# Altium PCB HVPS.PcbDoc (part 1 of 2)
Units mm, origin at the board's own origin, x right, y up, seen from the top; angles counter-clockwise.
Board outline 99 x 77 mm, 4 copper layers (L1, L2, L3, L4), stack 0.603 mm thick; 95 components, 67 nets, 310 pads, 327 vias.
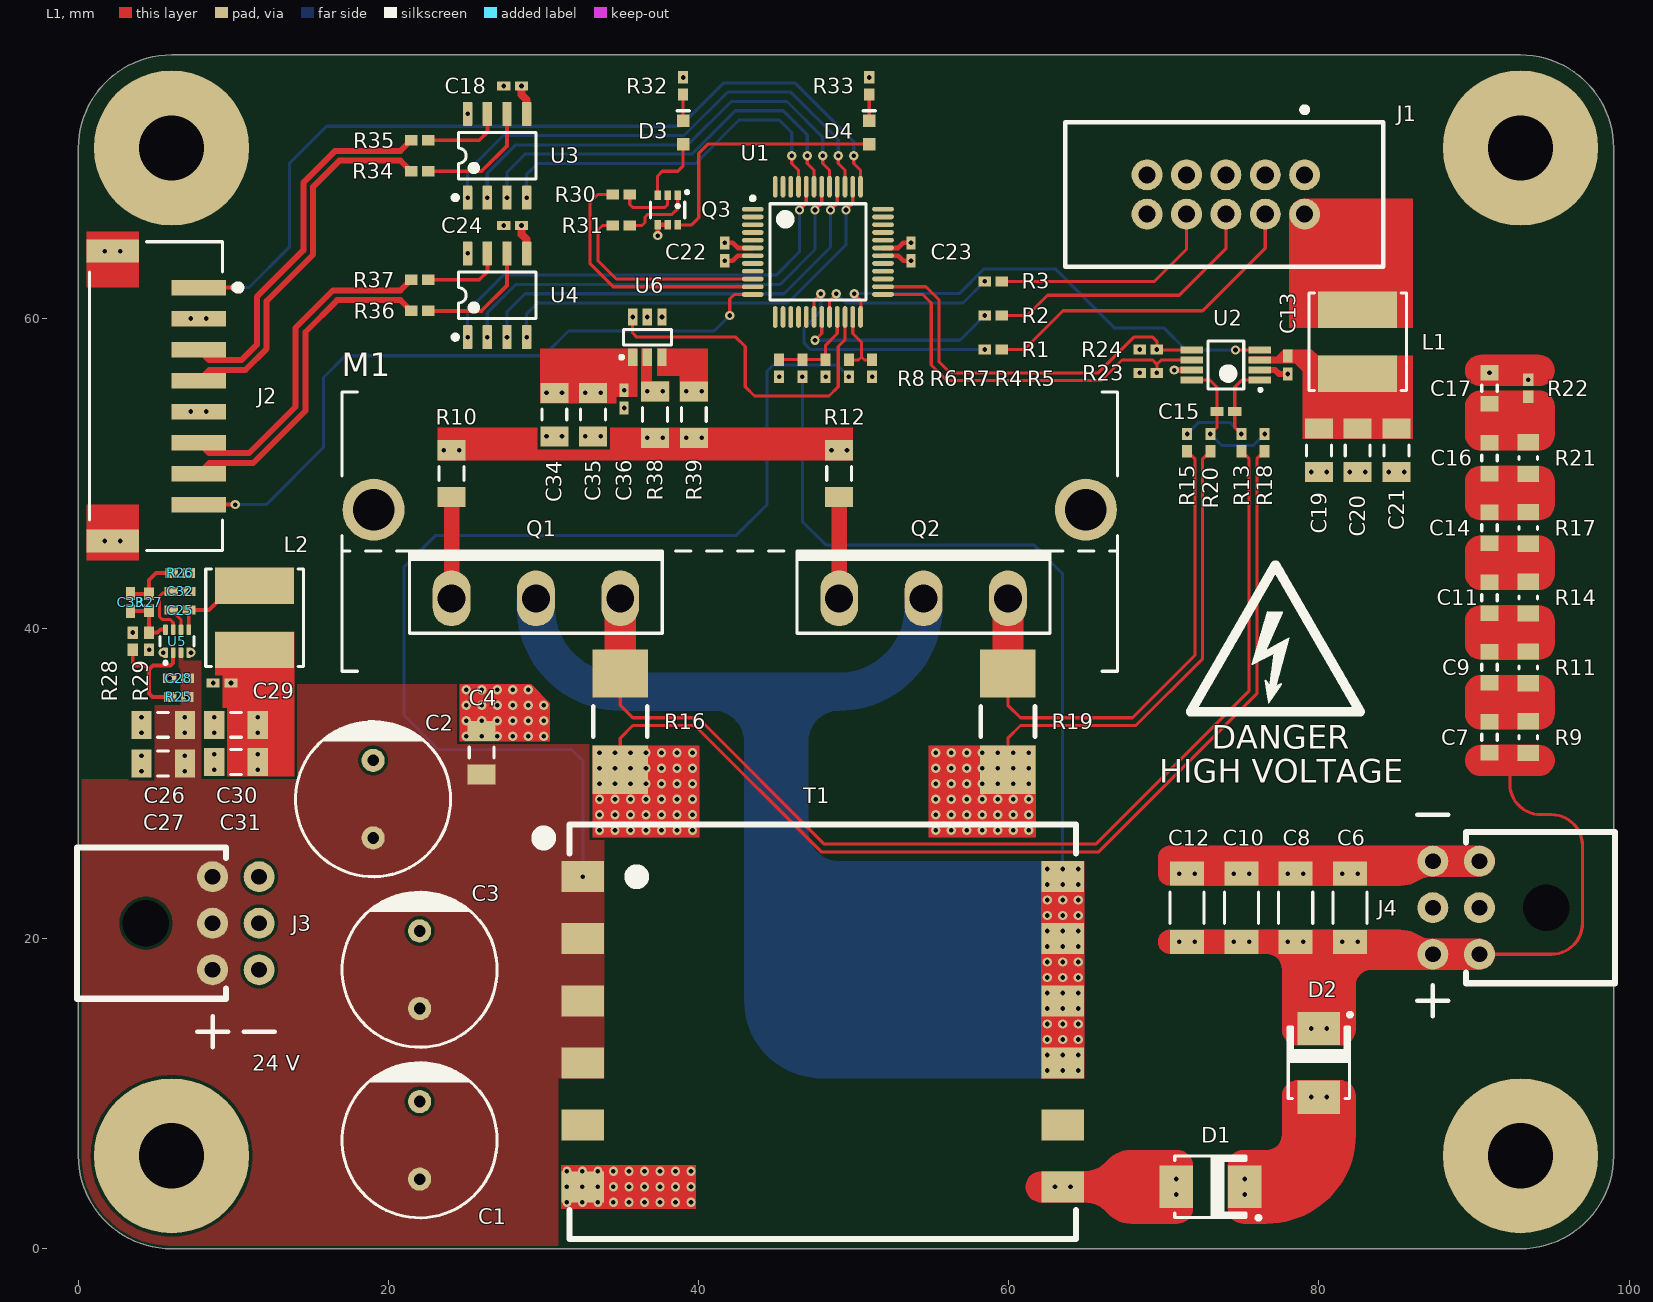
[diagram p0: L1 view]
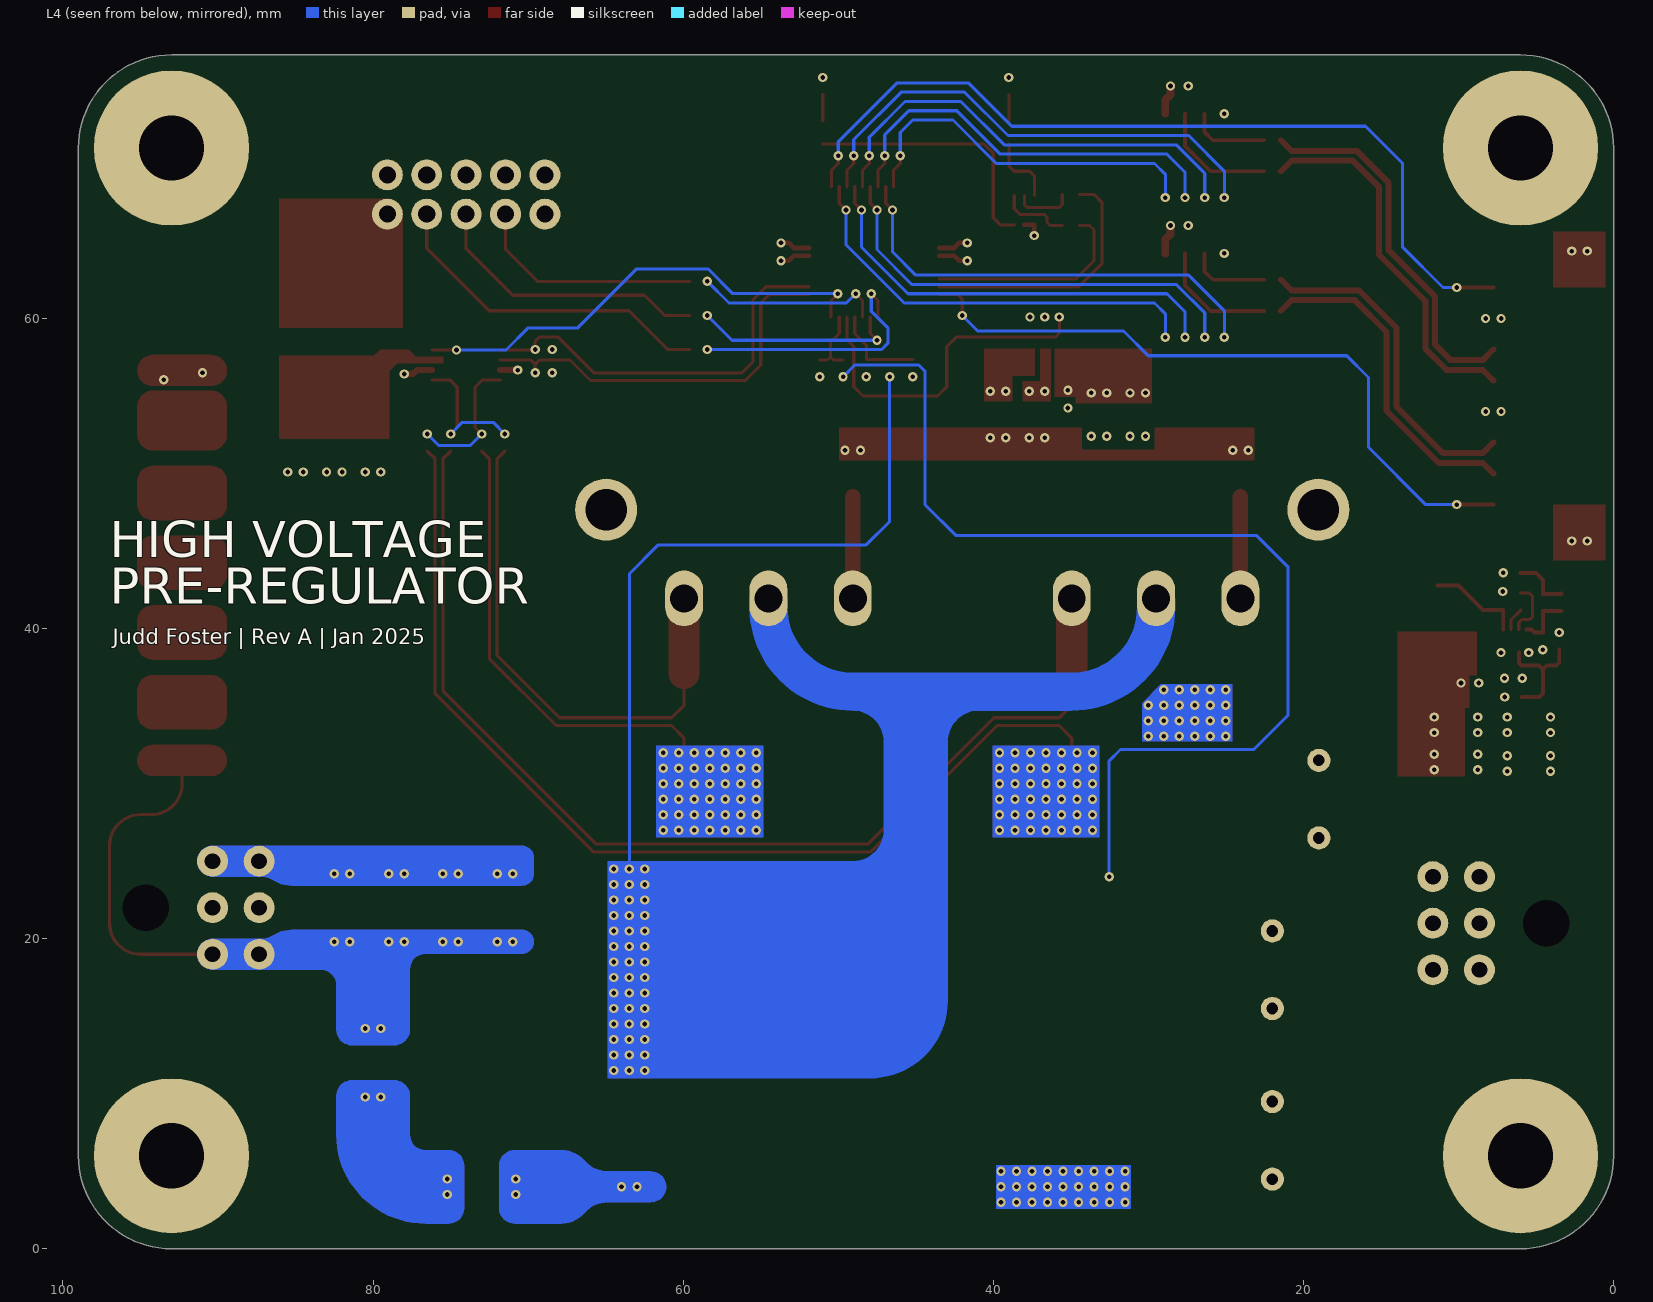
[diagram p1: L4 view, seen from below]
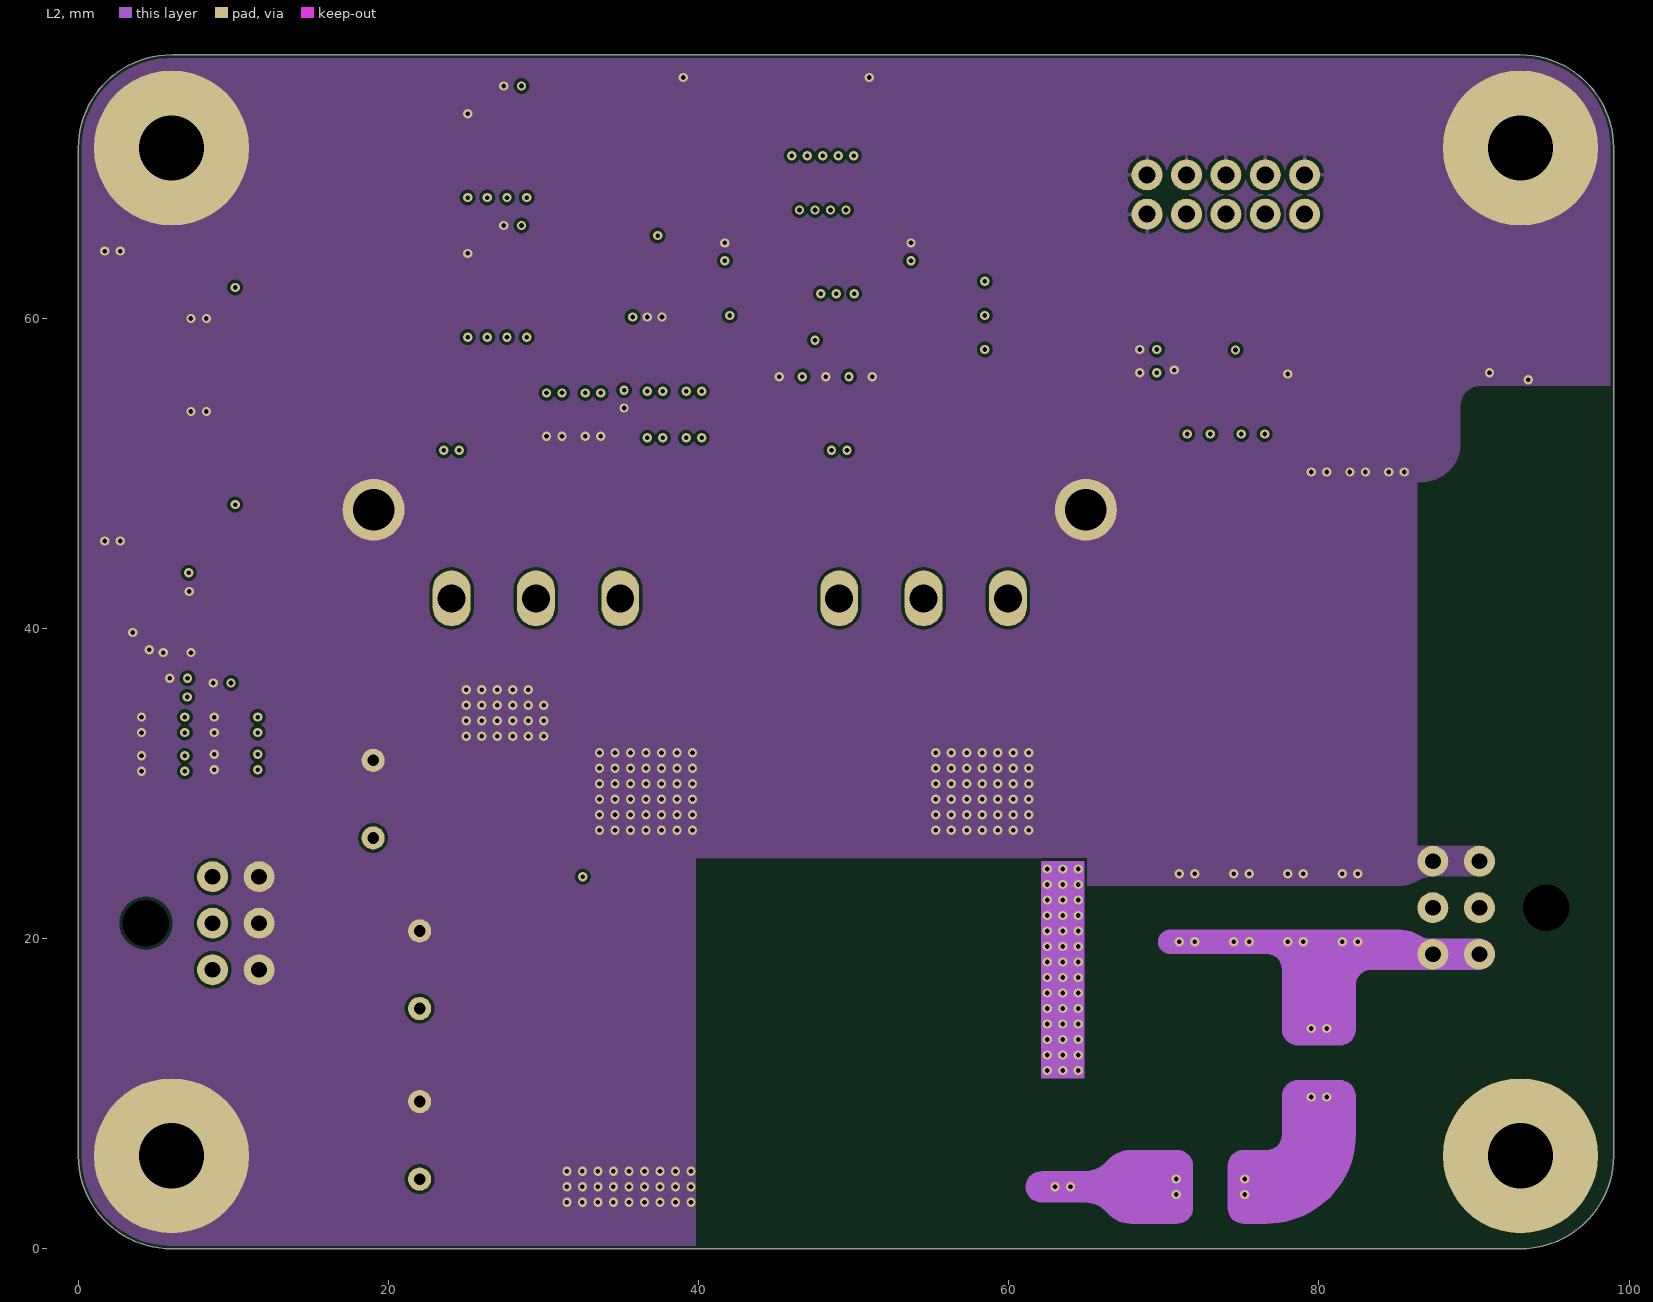
[diagram p2: L2]
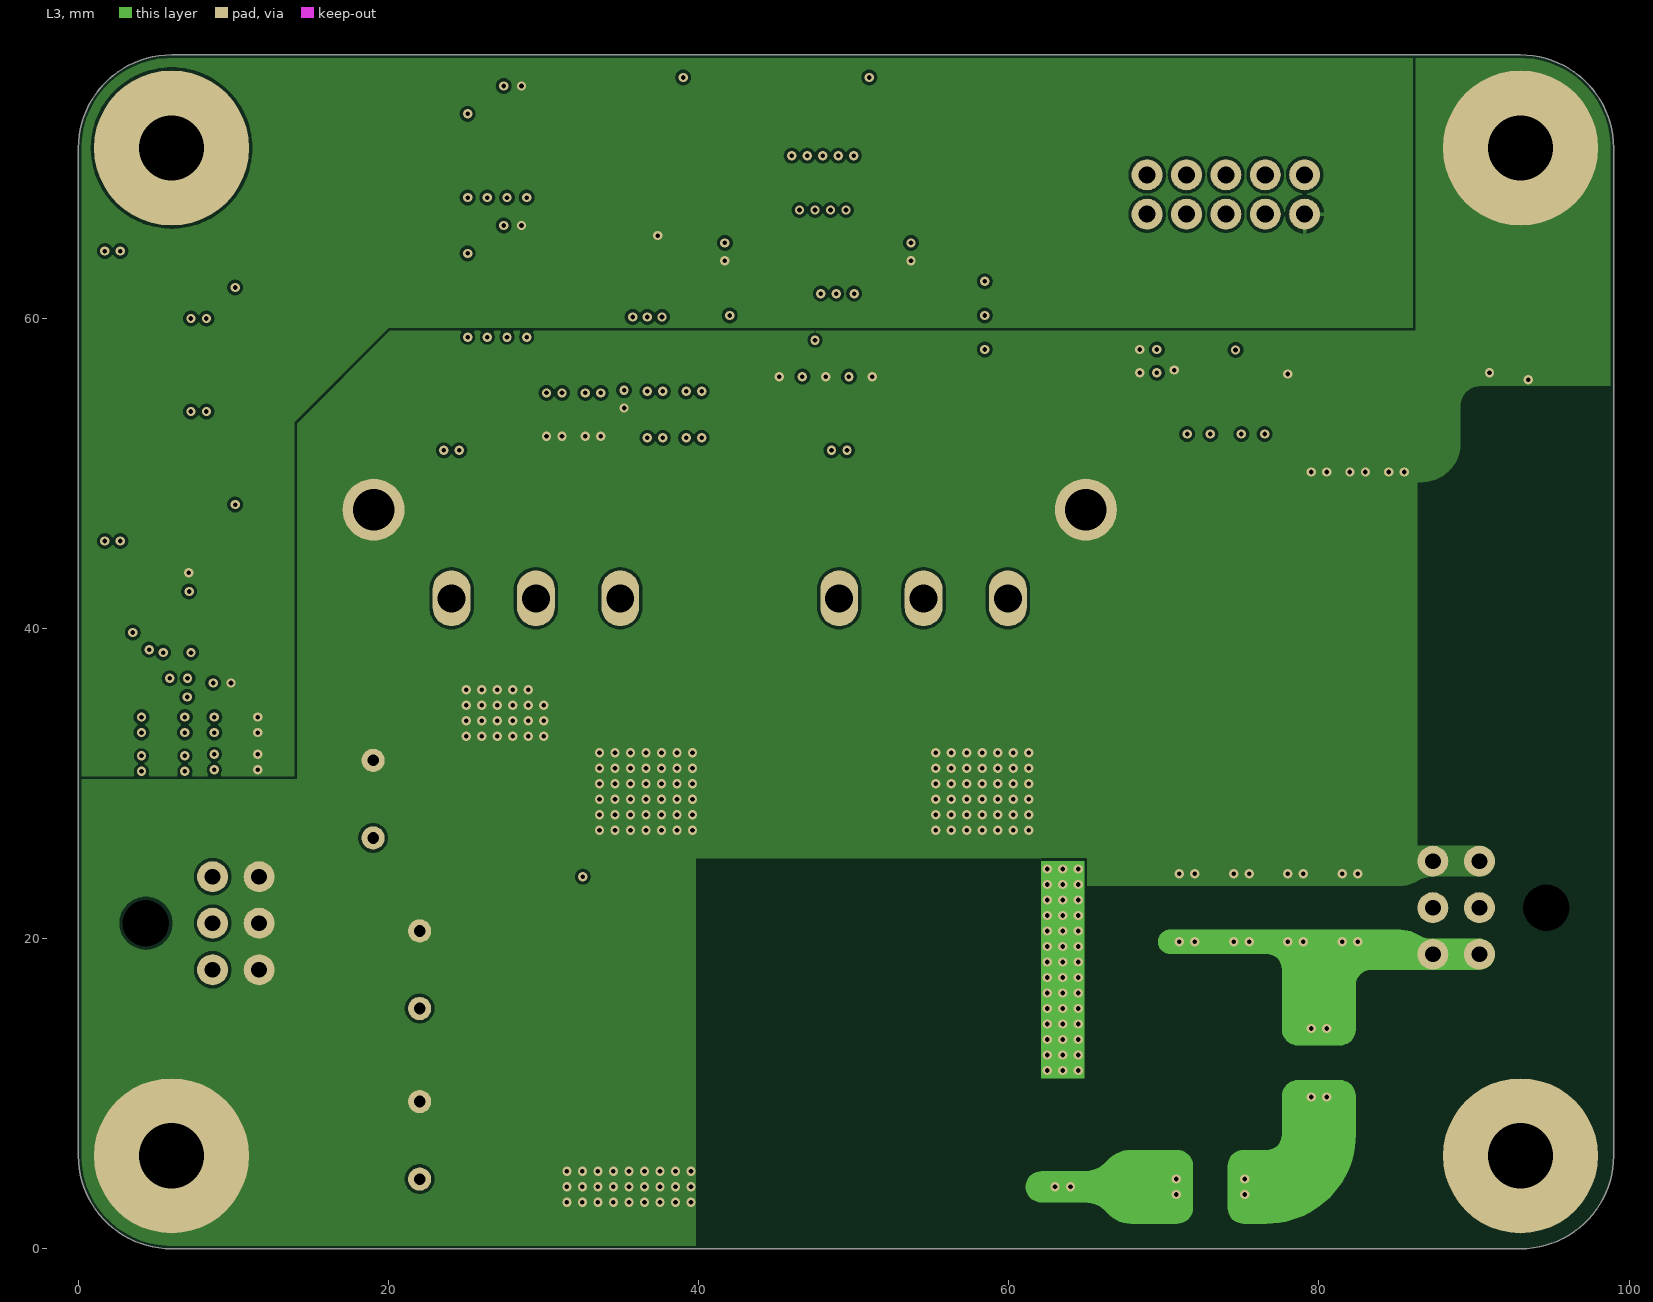
[diagram p3: L3]

## Layer stack, top to bottom
Top Solder: solder mask 0.0102, Solder Resist, Dk 3.5
L1: signal copper 0.0356
Dielectric 1: prepreg 0.0711, PP-006, Dk 4.1
L2: signal copper 0.035
Dielectric 2: dielectric 0.32, FR-4, Dk 4.8
L3: signal copper 0.035
Dielectric 3: prepreg 0.0711, PP-006, Dk 4.1
L4: signal copper 0.0356
Bottom Solder: solder mask 0.0102, Solder Resist, Dk 3.5

## Board outline
0,6 0,71 cw(c6,71) 6,77 93,77 cw(c93,71) 99,71 99,6 cw(c93,6) 93,0 6,0 cw(c6,6)

## Design rules (kind name [scope] priority, off if disabled: settings)
BoardOutlineClearance BoardOutlineClearance_MOLEX [HasFootprint('MOLEX_2125280600')] p1: gap=0 ignorepadtopadclearanceinfootprint=FALSE
BoardOutlineClearance [All] p2: gap=0.2 ignorepadtopadclearanceinfootprint=FALSE except(0: Arc-SplitContinuation Track-SplitContinuation SMDPad-SplitContinuation THPad-SplitContinuation Via-SplitContinuation Fill-SplitContinuation Poly-SplitContinuation Region-SplitContinuation Text-SplitContinuation)
Clearance [All] p1: gap=0.2 ignorepadtopadclearanceinfootprint=FALSE
DiffPairsRouting [All] p1: maxlimit=0.254 minlimit=0.254 mostfreqgap=0.254 toplayer_minwidth=0.381 toplayer_maxwidth=0.381 toplayer_prefwidth=0.381 midlayer1_minwidth=0.381 midlayer1_maxwidth=0.381 midlayer1_prefwidth=0.381 midlayer2_minwidth=0.381 midlayer2_maxwidth=0.381 midlayer2_prefwidth=0.381 bottomlayer_minwidth=0.381 bottomlayer_maxwidth=0.381 bottomlayer_prefwidth=0.381 maxuncoupledlength=12.7
Height [All] p1: minheight=0 maxheight=100 prefheight=12.7
HoleSize [All] p1: absolutevalues=TRUE maxlimit=6.3 minlimit=0.3 maxpercent=80.000 minpercent=20.000
MinimumSolderMaskSliver [All] p1: minsoldermaskwidth=0.099
PolygonConnect [All] p1: connectstyle=Direct reliefconductorwidth=0.254 reliefentries=4 polygonreliefangle="90 Angle" airgapwidth=0.254
RoutingVias [All] p1: holewidth=0.3 width=0.6 viastyle="Through Hole" minholewidth=0.3 minwidth=0.6 maxholewidth=0.3 maxwidth=0.6
SilkToSolderMaskClearance [IsPad] p1: minsilkscreentomaskgap=0.1 clearancetoexposedcopper=TRUE
SolderMaskExpansion SolderMaskExpansion_Via [IsVia] p1: expansion=0.076 istentingtop=TRUE
SolderMaskExpansion [All] p2: expansion=0.038 istentingtop=FALSE
Width [All] p1: maxlimit=5 minlimit=0.2 preferedwidth=0.2
25 further rules are at their usual default settings.

## Classes and differential pairs
differential pair D2: +D2_P -D2_N
differential pair D1: +D1_P -D1_N

## Components (designator, comment, footprint, x,y, rotation, side; value= is the part's Value field where it differs from the comment)
C1 "220u,20%,50V" CAPPR500W60D1000H1600B 22,7 r90 top value=220u
C2 "220u,20%,50V" CAPPR500W60D1000H1600B 19,29 r90 top value=220u
C3 "220u,20%,50V" CAPPR500W60D1000H1600B 22,18 r90 top value=220u
C4 "10u,20%,50V,X5R,1206" CAPC3216X16N 26,32 r270 top value=10u
C6 "100nF,10%,630V,X7R,1808" KEMET_PKG_LC 82,22 r270 top value=100nF
C7 "Omit" CAPC_0805 91,33 r270 top
C8 "100nF,10%,630V,X7R,1808" KEMET_PKG_LC 78.5,22 r270 top value=100nF
C9 "Omit" CAPC_0805 91,37.5 r270 top
C10 "100nF,10%,630V,X7R,1808" KEMET_PKG_LC 75,22 r270 top value=100nF
C11 "Omit" CAPC_0805 91,42 r270 top
C12 "100nF,10%,630V,X7R,1808" KEMET_PKG_LC 71.5,22 r270 top value=100nF
C13 "100n,25V,10%,X7R,0402" CAPC1005X06N 78,57 r90 top value=100nF
C14 "Omit" CAPC_0805 91,46.5 r270 top
C15 "Omit,0402" CAPC1005X06N 74,54 r0 top value=Omit
C16 "Omit" CAPC_0805 91,51 r270 top
C17 "Omit" CAPC_0805 91,55.5 r270 top
C18 "100n,25V,10%,X7R,0402" CAPC1005X06N 28,75 r0 top value=100nF
C19 "10u,20%,50V,X5R,1206" CAPC3216X16N 80,51.5 r90 top value=10u
C20 "10u,20%,50V,X5R,1206" CAPC3216X16N 82.5,51.5 r90 top value=10u
C21 "10u,20%,50V,X5R,1206" CAPC3216X16N 85,51.5 r90 top value=10u
C22 "100n,25V,10%,X7R,0402" CAPC1005X06N 41.687,64.302 r270 top value=100nF
C23 "100n,25V,10%,X7R,0402" CAPC1005X06N 53.687,64.302 r270 top value=100nF
C24 "100n,25V,10%,X7R,0402" CAPC1005X06N 28,66 r0 top value=100nF
C25 "100n,25V,10%,X7R,0402" CAPC1005X06N 6.559,41.196 r180 top value=100nF
C26 "10u,20%,50V,X5R,1206" CAPC3216X16N 5.459,33.796 r0 top value=10u
C27 "10u,20%,50V,X5R,1206" CAPC3216X16N 5.459,31.296 r0 top value=10u
C28 "100n,25V,10%,X7R,0402" CAPC1005X06N 6.459,36.796 r0 top value=100nF
C29 "100n,25V,10%,X7R,0402" CAPC1005X06N 9.259,36.496 r0 top value=100nF
C30 "10u,20%,50V,X5R,1206" CAPC3216X16N 10.159,33.796 r0 top value=10u
C31 "10u,20%,50V,X5R,1206" CAPC3216X16N 10.159,31.396 r0 top value=10u
C32 "33nF,10%,25V,X7R,0402" CAPC1005X06N 6.559,42.396 r180 top value=33nF
C33 "Omit,0402" CAPC1005X06N 3.359,41.696 r90 top value=Omit
C34 "10u,20%,50V,X5R,1206" CAPC3216X16N 30.687,53.802 r90 top value=10u
C35 "10u,20%,50V,X5R,1206" CAPC3216X16N 33.187,53.802 r90 top value=10u
C36 "100n,25V,10%,X7R,0402" CAPC1005X06N 35.187,54.802 r90 top value=100nF
D1 "MURS360BT3G" ONSEMI_SMB 73,4 r180 top
D2 "MURS360BT3G" ONSEMI_SMB 80,12 r270 top
D3 "Green" LITE-ON_LTST-C190KGKT 39,72 r90 top
D4 "Red" LITE-ON_LTST-C190KRKT 51,72 r90 top
J1 "302-S101" ONSHORE_302-S101 74,68 r180 top
J2 "S8B-PH-SM4-TB" JST_S8B-PH-SM4-TB 5,55 r270 top
J3 "2125280600" MOLEX_2125280600 8,21 r270 top
J4 "2125280600" MOLEX_2125280600 91,22 r90 top
L1 "6.8uH,3.6A,Wirewound,SMD" BOURNS_SRN6045TA 82.5,58.5 r270 top value=6.8uH
L2 "6.8uH,3.6A,Wirewound,SMD" BOURNS_SRN6045TA 11.359,40.696 r270 top value=6.8uH
M1 "MECH,Heatsink,omniKlip,OMNI-UNI-18-50" WAKEFIELD_OMNI-UNI-18-50 42,45 r0 top
Q1 "C" INFINEON_PKG_TO247AD 29.5,41.955 r0 top
Q2 "IRFP260MPBF" INFINEON_PKG_TO247AD 54.5,41.955 r0 top
Q3 "DMMT3906W-7-F" DIODES_SOT363 38,67 r270 top
R1 "150R,1%,0.063W,0402" RESC1005X04N 59,58 r180 top value=150R
R2 "150R,1%,0.063W,0402" RESC1005X04N 59,60.2 r180 top value=150R
R3 "150R,1%,0.063W,0402" RESC1005X04N 59,62.4 r180 top value=150R
R4 "10k,0.1%,0.063W,0402" RESC1005X04N 49.687,56.802 r90 top value=10k
R5 "10k,0.1%,0.063W,0402" RESC1005X04N 51.187,56.802 r270 top value=10k
R6 "10k,0.1%,0.063W,0402" RESC1005X04N 46.687,56.802 r90 top value=10k
R7 "10k,0.1%,0.063W,0402" RESC1005X04N 48.187,56.802 r270 top value=10k
R8 "1M,0.1%,0.063W,0402" RESC1005X04N 45.187,56.802 r90 top value=1M
R9 "442k,0.1%,0.125W,0805" RESC2012X07N 93.5,33 r270 top value=442k
R10 "10R,1%,0.25W,1206" RESC3216X06N 24.06,50 r270 top value=10R
R11 "442k,0.1%,0.125W,0805" RESC2012X07N 93.5,37.5 r270 top value=442k
R12 "10R,1%,0.25W,1206" RESC3216X06N 49.06,50 r270 top value=10R
R13 "1k,5%,0.063W,0402" RESC1005X04N 75,52 r270 top value=1k
R14 "442k,0.1%,0.125W,0805" RESC2012X07N 93.5,42 r270 top value=442k
R15 "1k,5%,0.063W,0402" RESC1005X04N 71.5,52 r270 top value=1k
R16 "0R005,1%,2W,2512" OHMITE_PKG_MCS3264 34.94,34 r90 top value=5m
R17 "442k,0.1%,0.125W,0805" RESC2012X07N 93.5,46.5 r270 top value=442k
R18 "1k,5%,0.063W,0402" RESC1005X04N 76.5,52 r270 top value=1k
R19 "0R005,1%,2W,2512" OHMITE_PKG_MCS3264 59.94,34 r90 top value=5m
R20 "1k,5%,0.063W,0402" RESC1005X04N 73,52 r270 top value=1k
R21 "442k,0.1%,0.125W,0805" RESC2012X07N 93.5,51 r270 top value=442k
R22 "10k,0.1%,0.063W,0402" RESC1005X04N 93.5,55.5 r270 top value=10k
R23 "10k,5%,0.063W,0402" RESC1005X04N 69,56.5 r0 top value=10k
R24 "10k,5%,0.063W,0402" RESC1005X04N 69,58 r0 top value=10k
R25 "511k,1%,0.063W,0402" RESC1005X04N 6.459,35.596 r0 top value=511k
R26 "49R9,1%,0.063W,0402" RESC1005X04N 6.559,43.596 r0 top value=49R9
R27 "53k6,1%,0.063W,0402" RESC1005X04N 4.559,41.696 r270 top value=53k6
R28 "88k7,1%,0.063W,0402" RESC1005X04N 3.5,39.196 r270 top value=88k7
R29 "10k2,1%,0.063W,0402" RESC1005X04N 4.559,39.196 r90 top value=10k2
R30 "10k,5%,0.063W,0402" RESC1005X04N 35,68 r180 top value=10k
R31 "10k,5%,0.063W,0402" RESC1005X04N 35,66 r180 top value=10k
R32 "330R,1%,0.063W,0402" RESC1005X04N 39,75 r270 top value=330R
R33 "330R,1%,0.063W,0402" RESC1005X04N 51,75 r270 top value=330R
R34 "0R0,0.1W,0402" RESC1005X04N 22,69.5 r0 top value=0R
R35 "0R0,0.1W,0402" RESC1005X04N 22,71.5 r0 top value=0R
R36 "0R0,0.1W,0402" RESC1005X04N 22,60.5 r0 top value=0R
R37 "0R0,0.1W,0402" RESC1005X04N 22,62.5 r0 top value=0R
R38 "0R0,0.25W,1206" RESC3216X06N 37.187,53.802 r270 top value=0R
R39 "0R0,0.25W,1206" RESC3216X06N 39.687,53.802 r270 top value=0R
T1 "GA3460-BL" COILCRAFT_GA3460-BL 48,14 r270 top
U1 "PIC18F56Q71-I/PT" TSQFP50P900X900X120-48N 47.687,64.302 r0 top
U2 "INA225AIDGKR" SOP65P490X110-8 74,57 r180 top
U3 "THVD1420DR" TEXASINSTRUMENTS_PKG_D0008A 27,70.5 r90 top
U4 "THVD1420DR" TEXASINSTRUMENTS_PKG_D0008A 27,61.5 r90 top
U5 "TPS62932DRLR" TEXASINSTRUMENTS_PKG_DRL0008A 6.359,39.196 r90 top
U6 "UCC27511AQDBVRQ1" SOTFL95P260X145-6 36.687,58.802 r90 top

## Footprints (in the part's own frame and the unit in brackets; to place one, negate y for a bottom-side part, rotate by r counter-clockwise, add the part's x,y. Pads: shape width x height; smd on the part's side, far side on the other; paste and mask are expansions set on the pad)
BOURNS_SRN6045TA [mm]
  rect 2.35x5.1 smd: 1(-2.075,0) 2(2.075,0)
  silkscreen extent -3.15,-3.15 3.15,3.15, body extent -3,-3 3,3, height 4.2
CAPC1005X06N [mm] "Chip Capacitor, 2-Leads, Body 1.0x0.5mm, IPC Medium Density"
  rect 0.85x0.6 smd: 1(-0.575,0) 2(0.575,0)
  body extent -0.53,-0.28 0.53,0.27, height 0.55
CAPC3216X16N [mm] "Chip Capacitor, 2-Leads, Body 3.20x1.60mm, IPC Medium Density"
  rect 1.3x1.8 smd: 1(-1.4,0) 2(1.4,0)
  silkscreen extent -0.35,-0.8 0.35,0.8, body extent -1.75,-0.95 1.75,0.95, height 1.6
CAPC_0805 [mm] "CAPC_0805"
  rect 1x1.15 smd: 1(-1,0) 2(1,0)
  silkscreen extent -0.2,-0.5 0.2,0.5, body extent -1,-0.5 1,0.5, height 1.2
CAPPR500W60D1000H1600B [mm] "CAPPR500W60D1000H1600B"
  round 1.5 hole 0.75 mask+0.05: 1(-2.5,0) 2(2.5,0)
  silkscreen extent -5,-5 5,5, body extent -5,-5 5,5, height 16
COILCRAFT_GA3460-BL [mm]
  rect 2x2.75 smd: 1(-10,-15.475) 2(-6,-15.475) 3(-2,-15.475) 4(2,-15.475) 5(6,-15.475) 6(10,-15.475) 7(10,15.475) 8(6,15.475) 9(2,15.475) 10(-2,15.475) 11(-6,15.475) 12(-10,15.475)
  silkscreen extent -13.38,-18.2 13.37,16.32, body extent -13.38,-16.33 13.38,16.33, height 14.01
DIODES_SOT363 [mm] "DIODES_SOT363"
  rect 0.6x0.42 smd mask+0.05: 1(-0.945,0.65) 2(-0.945,0) 3(-0.95,-0.65) 4(0.95,-0.65) 5(0.955,0) 6(0.955,0.65)
  silkscreen extent -1.25,-1.1 0.5,1.35, body extent -1.05,-1.07 1.05,1.07, height 1.11
INFINEON_PKG_TO247AD [mm]
  oval 2.44x3.6 hole 1.8: 1(-5.44,0) 2(0,0) 3(5.44,0)
  silkscreen extent -8.15,-2.25 8.15,3.05, body extent -7.9,-2.29 7.9,2.72, height 25.4
JST_S8B-PH-SM4-TB [mm]
  rect 1.5x3.4 smd: 0(-9.35,-2.8) 0(9.35,-2.8)
  rect 1x3.5 smd: 1(-7,2.75) 2(-5,2.75) 3(-3,2.75) 4(-1,2.75) 5(1,2.75) 6(3,2.75) 7(5,2.75) 8(7,2.75)
  silkscreen extent -9.95,-4.3 9.95,5.5, body extent -9.95,-4.3 9.95,4.3, height 5.5
KEMET_PKG_LC [mm]
  rect 1.55x2.2 smd: 1(-2.2,0) 2(2.2,0)
  silkscreen extent -1,-1.1 1,1.1, body extent -2.6,-1.1 2.6,1.1, height 2.15
LITE-ON_LTST-C190KGKT [mm] "LITE-ON_LTST-C190KGKT"
  rect 0.8x0.8 smd: A(-0.75,0) C(0.75,0)
  silkscreen extent 1.4,-0.4 1.4,0.4, body extent -0.8,-0.4 0.8,0.4, height 0.8
LITE-ON_LTST-C190KRKT [mm] "LITE-ON_LTST-C190KRKT"
  rect 0.8x0.8 smd: A(-0.75,0) C(0.75,0)
  silkscreen extent 1.4,-0.4 1.4,0.4, body extent -0.8,-0.4 0.8,0.4, height 0.8
MOLEX_2125280600 [mm] "MOLEX_2125280600"
  round 2 hole 1.02: 1(3,0.65) 2(0,0.65) 3(-3,0.65) 4(3,3.65) 5(0,3.65) 6(-3,3.65)
  round 0 hole 3 unplated: ""(0,-3.65)
  silkscreen extent -4.87,-8.1 4.87,1.51, body extent -4.92,-8.25 4.93,3.93, height 8.26
OHMITE_PKG_MCS3264 [mm]
  rect 3.1x3.57 smd: 1(-3.1,0) 2(3.1,0)
  silkscreen extent -0.98,-1.75 0.97,1.75, body extent -3.35,-1.75 3.35,1.75, height 0.85
ONSEMI_SMB [mm] "ONSEMI_SMB"
  rect 2.159x2.743 smd: 1(-2.21,0) 2(2.21,0)
  silkscreen extent -3.2,-1.97 2.3,2.1, body extent -2.72,-1.78 2.72,1.78, height 2.31
ONSHORE_302-S101 [mm] "ONSHORE_302-S101"
  round 2 hole 1.1 mask+0.05: 1(-5.08,-1.27) 2(-5.08,1.27) 3(-2.54,-1.27) 4(-2.54,1.27) 5(0,-1.27) 6(0,1.27) 7(2.54,-1.27) 8(2.54,1.27) 9(5.08,-1.27) 10(5.08,1.27)
  silkscreen extent -10.16,-5.62 10.35,4.65, body extent -10.16,-4.55 10.16,4.55, height 9
RESC1005X04N [mm] "Chip Resistor, 2-Leads, Body 1.0x0.5mm, IPC Medium Density"
  rect 0.8x0.65 smd: 1(-0.55,0) 2(0.55,0)
  body extent -0.52,-0.27 0.53,0.28, height 0.4
RESC2012X07N [mm] "Chip Resistor, 2-Leads, Body 2.1x1.3mm, IPC Medium Density"
  rect 1.05x1.4 smd: 1(-1.025,0) 2(1.025,0)
  silkscreen extent -0.1,-0.6 0.1,0.6, body extent -1.1,-0.7 1.1,0.7, height 0.7
RESC3216X06N [mm] "Chip Resistor, 2-Leads, Body 3.2x1.6mm, IPC Medium Density"
  rect 1.3x1.8 smd: 1(-1.5,0) 2(1.5,0)
  silkscreen extent -0.45,-0.8 0.45,0.8, body extent -1.67,-0.87 1.68,0.87, height 0.65
SOP65P490X110-8 [mm] "TSOP, 8-Leads, Body 3.00x3.00mm, Pitch 0.65mm"
  rect 1.45x0.45 smd mask+0.05: 1(-2.2,0.975) 2(-2.2,0.325) 3(-2.2,-0.325) 4(-2.2,-0.975) 5(2.2,-0.975) 6(2.2,-0.325) 7(2.2,0.325) 8(2.2,0.975)
  silkscreen extent -2.32,-1.55 1.15,1.7, body extent -2.45,-1.55 2.45,1.55, height 1.1
SOTFL95P260X145-6 [mm] "SOT23, 6-Leads, Body 2.90x2.80mm, Pitch 0.95mm"
  rect 1.1x0.6 smd: 1(-1.3,0.95) 2(-1.3,0) 3(-1.3,-0.95) 4(1.3,-0.95) 5(1.3,0) 6(1.3,0.95)
  silkscreen extent -1.4,-1.55 0.5,1.75, body extent -1.5,-1.53 1.5,1.53, height 1.1
TEXASINSTRUMENTS_PKG_D0008A [mm]
  rrect16% 1.55x0.6 smd: 1(-2.7,1.905) 2(-2.7,0.635) 3(-2.7,-0.635) 4(-2.7,-1.905) 5(2.7,-1.905) 6(2.7,-0.635) 7(2.7,0.635) 8(2.7,1.905)
  silkscreen extent -2.85,-2.5 1.5,2.85, body extent -3,-2.45 3,2.45, height 1.63
TEXASINSTRUMENTS_PKG_DRL0008A [mm]
  rrect33% 0.67x0.3 smd mask+0.05: 1(-0.74,0.75) 2(-0.74,0.25) 3(-0.74,-0.25) 4(-0.74,-0.75) 5(0.74,-0.75) 6(0.74,-0.25) 7(0.74,0.25) 8(0.74,0.75)
  silkscreen extent -1.5,-1.1 0.3,1.1, body extent -0.8,-1.05 0.8,1.05, height 0.6
TSQFP50P900X900X120-48N [mm] "TSQFP, 48-Leads, Body 7.00x7.00mm, Pitch 0.50mm, IPC Medium Density"
  oval 1.4x0.3 smd: 1(-4.2,2.75) 2(-4.2,2.25) 3(-4.2,1.75) 4(-4.2,1.25) 5(-4.2,0.75) 6(-4.2,0.25) 7(-4.2,-0.25) 8(-4.2,-0.75) 9(-4.2,-1.25) 10(-4.2,-1.75) 11(-4.2,-2.25) 12(-4.2,-2.75) 25(4.2,-2.75) 26(4.2,-2.25) 27(4.2,-1.75) 28(4.2,-1.25) 29(4.2,-0.75) 30(4.2,-0.25) 31(4.2,0.25) 32(4.2,0.75) 33(4.2,1.25) 34(4.2,1.75) 35(4.2,2.25) 36(4.2,2.75)
  oval 0.3x1.4 smd: 13(-2.75,-4.2) 14(-2.25,-4.2) 15(-1.75,-4.2) 16(-1.25,-4.2) 17(-0.75,-4.2) 18(-0.25,-4.2) 19(0.25,-4.2) 20(0.75,-4.2) 21(1.25,-4.2) 22(1.75,-4.2) 23(2.25,-4.2) 24(2.75,-4.2) 37(2.75,4.2) 38(2.25,4.2) 39(1.75,4.2) 40(1.25,4.2) 41(0.75,4.2) 42(0.25,4.2) 43(-0.25,4.2) 44(-0.75,4.2) 45(-1.25,4.2) 46(-1.75,4.2) 47(-2.25,4.2) 48(-2.75,4.2)
  silkscreen extent -4.32,-3.1 3.1,3.57, body extent -3.5,-3.5 3.5,3.5, height 1.2
WAKEFIELD_OMNI-UNI-18-50 [mm]
  round 4 hole 2.67: 1(-22.97,2.67) 2(22.97,2.67)
  silkscreen extent -25,-7.75 25,10.25, body extent -25,-7.75 25,10.25, height 40.5

## Part data
C1 C2 C3: library part CAP,Alum,220uF,20%,50VDC,Radial,Thru, "220 ï¿½F 50 V Aluminum Electrolytic Capacitors Radial, Can 5000 Hrs @ 105ï¿½C", Manufacturer 1=Rubycon, Manufacturer 1 Part Number=50YXG220MEFCT810X16, Vendor 1 Part Number=1189-3771-1-ND, CreatedBy="Judd Foster", HelpURL=https://www.rubycon.co.jp/wp-content/uploads/catalog-aluminum/YXG.pdf, Part Name=CAP,Alum,220uF,20%,50VDC,Radial,Thru, Vendor 1=Digikey
C4 C19 C20 C21 C26 C27 C30 C31 C34 C35: library part CAP,Cer,10uF,50VDC,X5R,1206, "10ï¿½F ï¿½20% 50V Ceramic Capacitor X5R 1206 (3216 Metric)", Manufacturer 1="Samsung Electro-Mechanics", Manufacturer 1 Part Number=CL31A106MBHNNNE, Vendor 1 Part Number=1276-6736-1-ND, CreatedBy="Judd Foster", HelpURL=https://www.samsungsem.com/resources/file/global/support/product_catalog/MLCC.pdf, Part Name=CAP,Cer,10uF,50VDC,X5R,1206, Vendor 1=Digikey
C6 C8 C10 C12: library part CAP,Cer,100nF,10%,630V,X7R,1808, "0.1 ÂµF Â±10% 630V Ceramic Capacitor X7R 1808 (4520 Metric)", Manufacturer 1=KEMET, Manufacturer 1 Part Number=C1808C104KBRAC7800, Vendor 1 Part Number=399-C1808C104KBRAC7800CT-ND, CreatedBy="Judd Foster", HelpURL=https://content.kemet.com/datasheets/KEM_C1010_X7R_HV_SMD.pdf, Part Name=CAP,Cer,100nF,10%,630V,X7R,1808, Vendor 1=DigiKey
C7 C9 C11 C14 C16 C17: library part CAP,Omit,0805, Manufacturer 1=N/A, CreatedBy="Judd Foster", HelpURL=N/A, Manufacturer 1 Part Number=N/A, Part Name=CAP,Omit,0805, Vendor 1=N/A, Vendor 1 Part Number=N/A
C13 C18 C22 C23 C24 C25 C28 C29 C36: library part CAP,Cer,100nF,10%,25VDC,X7R,0402, "0.1ï¿½F ï¿½10% 25V Ceramic Capacitor X7R 0402 (1005 Metric)", Manufacturer 1="Murata Electronics", Manufacturer 1 Part Number=GRM155R71E104KE14J, Vendor 1 Part Number=490-14603-1-ND, CreatedBy="Judd Foster", HelpURL=https://search.murata.co.jp/Ceramy/image/img/A01X/G101/ENG/GRM155R71E104KE14-01.pdf, Part Name=CAP,Cer,100nF,10%,25VDC,X7R,0402, Vendor 1=DigiKey
C15 C33: library part CAP,Omit,0402, "Omit", Manufacturer 1=N/A, CreatedBy="Judd Foster", HelpURL=N/A, Manufacturer 1 Part Number=N/A, Part Name=CAP,Omit,0402, Vendor 1=N/A, Vendor 1 Part Number=N/A
C32: library part CAP,Cer,33nF,10%,25V,X7R,0402, "0.033 ÂµF Â±10% 25V Ceramic Capacitor X7R 0402 (1005 Metric)", Manufacturer 1="Murata Electronics", Manufacturer 1 Part Number=GRM155R71E333KA88D, Vendor 1 Part Number=490-3253-1-ND, CreatedBy="Judd Foster", HelpURL=https://search.murata.co.jp/Ceramy/image/img/A01X/G101/ENG/GRM155R71E333KA88-01.pdf, Part Name=CAP,Cer,33nF,10%,25V,X7R,0402, Vendor 1=DigiKey
D1 D2: library part Diode,Gen,600V,3A,SMB, "Diode 600 V 3A Surface Mount SMB", Manufacturer 1=onsemi, Vendor 1 Part Number=MURS360BT3GOSCT-ND, CreatedBy="Judd Foster", HelpURL=https://www.onsemi.com/pdf/datasheet/murs360bt3-d.pdf, Manufacturer 1 Part Number=MURS360BT3G, Part Name=Diode,Gen,600V,3A,SMB, Vendor 1=Digikey
D3: library part LED,Green,SMD,0603, "Green 571nm LED Indication - Discrete 2V 0603 (1608 Metric)", Manufacturer 1="Lite-On Inc.", Manufacturer 1 Part Number=LTST-C190KGKT, Vendor 1 Part Number=160-1435-1-ND, CreatedBy="Judd Foster", HelpURL=https://optoelectronics.liteon.com/upload/download/DS22-2000-074/LTST-C190KGKT.PDF, Part Name=LED,Green,SMD,0603, Vendor 1=Digikey
D4: library part LED,Red,SMD,0603, "Red 631nm LED Indication - Discrete 2V 0603 (1608 Metric)", Manufacturer 1="Lite-On Inc.", Manufacturer 1 Part Number=LTST-C190KRKT, Vendor 1 Part Number=160-1436-1-ND, CreatedBy="Judd Foster", HelpURL=https://optoelectronics.liteon.com/upload/download/DS-22-99-0151/LTST-C190KRKT.pdf, Part Name=LED,Red,SMD,0603, Vendor 1=Digikey
J1: library part "Term,Header,5x2 Pin,2.54mm,Thru", "Connector Header Through Hole 10 position 0.100\" (2.54mm)", Manufacturer 1="On Shore Technology Inc.", Vendor 1 Part Number=ED1543-ND, CreatedBy="Judd Foster", HelpURL=https://mm.digikey.com/Volume0/opasdata/d220001/medias/docus/6025/302-S.pdf, Manufacturer 1 Part Number=302-S101, Part Name="Term,Header,5x2 Pin,2.54mm,Thru", Vendor 1=Digikey
J2: library part "CONN,JST,8 Pin,2mm,RA,SMD", "Connector Header Surface Mount, Right Angle 8 position 0.079\" (2.00mm)", Manufacturer 1="JST Sales America Inc.", Vendor 1 Part Number=455-S8B-PH-SM4-TBCT-ND, CreatedBy="Judd Foster", HelpURL=https://www.jst-mfg.com/product/pdf/eng/ePH.pdf, Manufacturer 1 Part Number=S8B-PH-SM4-TB, Part Name="CONN,JST,8 Pin,2mm,RA,SMD", Vendor 1=DigiKey
J3 J4: library part Conn,Micro-Fit,Hdr,6Pos,RA,Thru, "Connector Header Through Hole, Right Angle 6 position 0.118\" (3.00mm)", Manufacturer 1=Molex, Vendor 1 Part Number=900-2125280600-ND, CreatedBy="Judd Foster", HelpURL=https://www.molex.com/webdocs/datasheets/pdf/en-us/2125280600_PCB_HEADERS.pdf, Manufacturer 1 Part Number=2125280600, Part Name=Conn,Micro-Fit,Hdr,6Pos,RA,Thru, Vendor 1=Digikey
L1 L2: library part IND,6.8uH,3.6A,Wirewound,SMD, "6.8 ÂµH Semi-Shielded Drum Core, Wirewound Inductor 3.6 A 34mOhm Nonstandard", Manufacturer 1="Bourns Inc.", Manufacturer 1 Part Number=SRN6045TA-6R8M, Vendor 1 Part Number=SRN6045TA-6R8MCT-ND, CreatedBy="Judd Foster", HelpURL=https://www.bourns.com/docs/Product-Datasheets/SRN6045TA.pdf, Part Name=IND,6.8uH,3.6A,Wirewound,SMD, Vendor 1=DigiKey
M1: "Heat Sinks omniKlip Heat Sink for TO-247, TO-264, 18mm Wide, 50mm Long, Aluminum", Manufacturer 1="Wakefield Thermal", Manufacturer 1 Part Number=OMNI-UNI-18-50, Vendor 1 Part Number=567-OMNI-UNI-18-50, CreatedBy="Judd Foster", HelpURL=https://www.mouser.com/datasheet/2/433/omniKlip_Wakefield_Vette-3050203.pdf, Part Name=MECH,Heatsink,omniKlip,OMNI-UNI-18-50, Vendor 1=Mouser
Q1: library part "MOSFET,N Ch,200V,50A,IRFP260MPBF", "N-Channel 200 V 50A (Tc) 300W (Tc) Through Hole TO-247AC", Manufacturer 1="Infineon Technologies", Manufacturer 1 Part Number=IRFP260MPBF, Vendor 1 Part Number=IRFP260MPBF-ND, CreatedBy="Judd Foster", HelpURL=https://www.infineon.com/dgdl/irfp260mpbf.pdf?fileId=5546d462533600a40153562894e91fe0, Part Name="MOSFET,N Ch,200V,50A,IRFP260MPBF", Vendor 1=DigiKey
Q2: library part "MOSFET,N Ch,200V,50A,IRFP260MPBF", "N-Channel 200 V 50A (Tc) 300W (Tc) Through Hole TO-247AC", Manufacturer 1="Infineon Technologies", Vendor 1 Part Number=IRFP260MPBF-ND, CreatedBy="Judd Foster", HelpURL=https://www.infineon.com/dgdl/irfp260mpbf.pdf?fileId=5546d462533600a40153562894e91fe0, Manufacturer 1 Part Number=IRFP260MPBF, Part Name="MOSFET,N Ch,200V,50A,IRFP260MPBF", Vendor 1=DigiKey
Q3: library part Trans,PNP,Dual,40V,200mA,SOT363, "Bipolar (BJT) Transistor Array 2 PNP (Dual) Matched Pair 40V 200mA 250MHz 200mW Surface Mount SOT-363", Manufacturer 1="Diodes Incorporated", Vendor 1 Part Number=DMMT3906W-FDICT-ND, CreatedBy="Judd Foster", HelpURL=https://www.diodes.com/assets/Datasheets/ds30312.pdf, Manufacturer 1 Part Number=DMMT3906W-7-F, Part Name=Trans,PNP,Dual,40V,200mA,SOT363, Vendor 1=Digikey
R1 R2 R3: library part RES,150R,1%,0.1W,0402, "150 Ohms ï¿½1% 0.063W, 1/16W Chip Resistor 0402 (1005 Metric) Automotive AEC-Q200, Moisture Resistant Thick Film", Manufacturer 1="TE Connectivity Passive Product", Manufacturer 1 Part Number=CRGCQ0402F150R, Vendor 1 Part Number=A129617CT-ND, CreatedBy="Judd Foster", HelpURL=https://www.te.com/commerce/DocumentDelivery/DDEController?Action=srchrtrv&DocNm=1773204-3&DocType=DS&DocLang=English, Part Name=RES,150R,1%,0.1W,0402, Vendor 1=Digikey
R4 R5 R6 R7 R22: library part RES,10k,0.1%,0.063W,0402, "10 kOhms ï¿½0.1% 0.1W, 1/10W Chip Resistor 0402 (1005 Metric) Automotive AEC-Q200 Thin Film", Manufacturer 1="Stackpole Electronics Inc", Manufacturer 1 Part Number=RNCF0402BTE10K0, Vendor 1 Part Number=RNCF0402BTE10K0CT-ND, CreatedBy="Judd Foster", HelpURL=https://www.seielect.com/catalog/sei-rncf.pdf, Part Name=RES,10k,0.1%,0.063W,0402, Vendor 1=Digikey
R8: library part RES,1M,0.1%,0.063W,0402, "1 MOhms Â±0.1% 0.063W, 1/16W Chip Resistor 0402 (1005 Metric) Thick Film", Manufacturer 1=YAGEO, Manufacturer 1 Part Number=RE0402BRE071ML, Vendor 1 Part Number=13-RE0402BRE071MLCT-ND, CreatedBy="Judd Foster", HelpURL=https://www.yageo.com/upload/media/product/app/datasheet/rchip/pyu-re_105_rohs_l.pdf, Part Name=RES,1M,0.1%,0.063W,0402, Vendor 1=DigiKey
R9 R11 R14 R17 R21: library part RES,442k,0.1%,0.125W,0805, "442 kOhms Â±0.1% 0.125W, 1/8W Chip Resistor 0805 (2012 Metric) Automotive AEC-Q200 Thin Film", Manufacturer 1="Panasonic Electronic Components", Manufacturer 1 Part Number=ERA-6AEB4423V, Vendor 1 Part Number=P442KDACT-ND, CreatedBy="Judd Foster", HelpURL=https://industrial.panasonic.com/cdbs/www-data/pdf/RDM0000/AOA0000C307.pdf, Part Name=RES,442k,0.1%,0.125W,0805, Vendor 1=DigiKey
R10 R12: library part RES,10R,1%,0.25W,1206, "10 ï¿½1% 0.25W, 1/4W Chip Resistor 1206 (3216 Metric) Automotive AEC-Q200, Moisture Resistant Thick Film", Manufacturer 1="TE Connectivity Passive Product", Manufacturer 1 Part Number=CRGCQ1206F10R, Vendor 1 Part Number=A129786CT-ND, CreatedBy="Judd Foster", HelpURL=https://www.te.com/commerce/DocumentDelivery/DDEController?Action=srchrtrv&DocNm=1773204-3&DocType=DS&DocLang=English, Part Name=RES,10R,1%,0.25W,1206, Vendor 1=Digikey
R13 R15 R18 R20: library part RES,1k,5%,0.063W,0402, "1 kOhms ï¿½5% 0.063W, 1/16W Chip Resistor 0402 (1005 Metric) Automotive AEC-Q200 Thick Film", Manufacturer 1="Stackpole Electronics Inc", Manufacturer 1 Part Number=RMCF0402JT1K00, Vendor 1 Part Number=RMCF0402JT1K00CT-ND, CreatedBy="Judd Foster", HelpURL=https://www.seielect.com/catalog/sei-rmcf_rmcp.pdf, Part Name=RES,1k,5%,0.063W,0402, Vendor 1=DIgikey
R16 R19: library part RES,0R005,1%,2W,2512, "5 mOhms Â±1% 2W Chip Resistor 2512 (6432 Metric) Current Sense, Flame Retardant Coating, Safety Metal Element", Manufacturer 1=Ohmite, Manufacturer 1 Part Number=MCS3264R005FER, Vendor 1 Part Number=MCS3264R005FERCT-ND, CreatedBy="Judd Foster", HelpURL=https://www.ohmite.com/assets/images/res-mcs.pdf, Part Name=RES,0R005,1%,2W,2512, Vendor 1=DigiKey
R23 R24 R30 R31: library part RES,10k,5%,0.063W,0402, "10 kOhms ï¿½5% 0.063W, 1/16W Chip Resistor 0402 (1005 Metric) Automotive AEC-Q200 Thick Film", Manufacturer 1="Stackpole Electronics Inc", Manufacturer 1 Part Number=RMCF0402JT10K0, Vendor 1 Part Number=RMCF0402JT10K0CT-ND, CreatedBy="Judd Foster", HelpURL=https://www.seielect.com/catalog/sei-rmcf_rmcp.pdf, Part Name=RES,10k,5%,0.063W,0402, Vendor 1=DIgikey
R25: library part RES,511k,1%,0.063W,0402, "511 kOhms Â±1% 0.063W, 1/16W Chip Resistor 0402 (1005 Metric) Moisture Resistant Thick Film", Manufacturer 1=YAGEO, Manufacturer 1 Part Number=RC0402FR-07511KL, Vendor 1 Part Number=YAG3176CT-ND, CreatedBy="Judd Foster", HelpURL=https://www.yageo.com/upload/media/product/products/datasheet/rchip/PYu-RC_Group_51_RoHS_L_12.pdf, Part Name=RES,511k,1%,0.063W,0402, Vendor 1=DigiKey
R26: library part RES,49R9,1%,0.063W,0402, "49.9 Ohms Â±1% 0.063W, 1/16W Chip Resistor 0402 (1005 Metric) Moisture Resistant Thick Film", Manufacturer 1=YAGEO, Manufacturer 1 Part Number=RC0402FR-0749R9L, Vendor 1 Part Number=311-49.9LRCT-ND, CreatedBy="Judd Foster", HelpURL=https://www.yageo.com/upload/media/product/products/datasheet/rchip/PYu-RC_Group_51_RoHS_L_12.pdf, Part Name=RES,49R9,1%,0.063W,0402, Vendor 1=DigiKey
R27: library part RES.53k6,1%,0.063W,0402, "53.6 kOhms Â±1% 0.063W, 1/16W Chip Resistor 0402 (1005 Metric) Moisture Resistant Thick Film", Manufacturer 1=YAGEO, Manufacturer 1 Part Number=RC0402FR-0753K6L, Vendor 1 Part Number=311-53.6KLRCT-ND, CreatedBy="Judd Foster", HelpURL=https://www.yageo.com/upload/media/product/products/datasheet/rchip/PYu-RC_Group_51_RoHS_L_12.pdf, Part Name=RES.53k6,1%,0.063W,0402, Vendor 1=DigiKey
R28: library part RES,88k7,1%,0.063W,0402, "88.7 kOhms Â±1% 0.063W, 1/16W Chip Resistor 0402 (1005 Metric) Automotive AEC-Q200, Moisture Resistant Thick Film", Manufacturer 1=YAGEO, Manufacturer 1 Part Number=AC0402FR-0788K7L, Vendor 1 Part Number=13-AC0402FR-0788K7LCT-ND, CreatedBy="Judd Foster", HelpURL=https://www.yageo.com/upload/media/product/productsearch/datasheet/rchip/PYu-AC_51_RoHS_L_10.pdf, Part Name=RES,88k7,1%,0.063W,0402, Vendor 1=DigiKey
R29: library part RES,10k2,1%,0.063W,0402, "10.2 kOhms Â±1% 0.063W, 1/16W Chip Resistor 0402 (1005 Metric) Moisture Resistant Thick Film", Manufacturer 1=YAGEO, Manufacturer 1 Part Number=RC0402FR-0710K2L, Vendor 1 Part Number=YAG2950CT-ND, CreatedBy="Judd Foster", HelpURL=https://www.yageo.com/upload/media/product/products/datasheet/rchip/PYu-RC_Group_51_RoHS_L_12.pdf, Part Name=RES,10k2,1%,0.063W,0402, Vendor 1=DigiKey
R32 R33: library part RES,330R,1%,0.063W,0402, "330 Ohms Â±1% 0.063W, 1/16W Chip Resistor 0402 (1005 Metric) Moisture Resistant Thick Film", Manufacturer 1=YAGEO, Manufacturer 1 Part Number=RC0402FR-07330RL, Vendor 1 Part Number=311-330LRCT-ND, CreatedBy="Judd Foster", HelpURL=https://www.yageo.com/upload/media/product/products/datasheet/rchip/PYu-RC_Group_51_RoHS_L_12.pdf, Part Name=RES,330R,1%,0.063W,0402, Vendor 1=DigiKey
R34 R35 R36 R37: library part RES,0R0,0.1W,0402, "0 Ohms Jumper 0.1W, 1/10W Chip Resistor 0402 (1005 Metric) Automotive AEC-Q200 Thick Film", Manufacturer 1="Panasonic Electronic Components", Manufacturer 1 Part Number=ERJ-2GE0R00X, Vendor 1 Part Number=P0.0JCT-ND, CreatedBy="Judd Foster", HelpURL=https://industrial.panasonic.com/cdbs/www-data/pdf/RDA0000/AOA0000C301.pdf, Part Name=RES,0R0,0.1W,0402, Vendor 1=Digikey
R38 R39: library part RES,0R0,0.25W,1206, "0 Ohms Jumper Chip Resistor 1206 (3216 Metric) Automotive AEC-Q200 Thick Film", Manufacturer 1="Stackpole Electronics Inc", Manufacturer 1 Part Number=RMCF1206ZT0R00, Vendor 1 Part Number=RMCF1206ZT0R00CT-ND, CreatedBy="Judd Foster", HelpURL=https://www.seielect.com/catalog/sei-rmcf_rmcp.pdf, Part Name=RES,0R0,0.25W,1206, Vendor 1=Digikey
T1: library part XFR,Flyback,COILCRAFT_GA3460-BL, "Audio Transformers / Signal Transformers GA3460 for LT3751 500V 50A", Manufacturer 1=Coilcraft, Vendor 1 Part Number=994-GA3460-BL, CreatedBy="Judd Foster", HelpURL=https://www.mouser.ca/datasheet/2/597/ga3459-463457.pdf, Manufacturer 1 Part Number=GA3460-BL, Part Name=XFR,Flyback,COILCRAFT_GA3460-BL, Vendor 1=Mouser
U1: "PIC PICï¿½ 18F Microcontroller IC 8-Bit 64MHz 64KB (64K x 8) FLASH 48-TQFP (7x7)", Manufacturer 1="Microchip Technology", Vendor 1 Part Number=150-PIC18F56Q71-I/PT-ND, CreatedBy="Judd Foster", HelpURL=https://ww1.microchip.com/downloads/aemDocuments/documents/MCU08/ProductDocuments/DataSheets/PIC18F26-46-56Q71-Microcontroller-Data-Sheet-DS40002329.pdf, Manufacturer 1 Part Number=PIC18F56Q71-I/PT, Part Name=PIC18F56Q71-I/PT, Vendor 1=Digikey
U2: "General Purpose Amplifier Circuit Rail-to-Rail 8-VSSOP", Manufacturer 1="Texas Instruments", Vendor 1 Part Number=296-46096-1-ND, CreatedBy="Judd Foster", HelpURL=https://www.ti.com/general/docs/suppproductinfo.tsp?distId=10&gotoUrl=https%3A%2F%2Fwww.ti.com%2Flit%2Fgpn%2Fina225, Manufacturer 1 Part Number=INA225AIDGKR, Part Name=INA225AIDGKR, Vendor 1=Digikey
U3 U4: "1/1 Transceiver Half RS422, RS485 8-SOIC", Manufacturer 1="Texas Instruments", Vendor 1 Part Number=296-THVD1420DRCT-ND, CreatedBy="Judd Foster", HelpURL=https://www.ti.com/lit/ds/symlink/thvd1420.pdf?HQS=dis-dk-null-digikeymode-dsf-pf-null-wwe&ts=1735314435967, Manufacturer 1 Part Number=THVD1420DR, Part Name=THVD1420DR, Vendor 1=DigiKey
U5: "Buck Switching Regulator IC Positive Adjustable 0.8V 1 Output 2A SOT-583", Manufacturer 1="Texas Instruments", Vendor 1 Part Number=296-TPS62932DRLRCT-ND, CreatedBy="Judd Foster", HelpURL=https://www.ti.com/lit/ds/symlink/tps62932.pdf?ts=1695814293505&ref_url=https%253A%252F%252Fwww.ti.com%252Fsitesearch%252Fen-us%252Fdocs%252Funiversalsearch.tsp%253FlangPref%253Den-US%2526searchTerm%253DTPS62932DRLR%2526nr%253D12%2526login-check%253Dtrue, Manufacturer 1 Part Number=TPS62932DRLR, Part Name=TPS62932DRLR, Vendor 1=DigiKey
U6: "Gate Drivers Sngl-Ch high-Spd Low-Side Gate Driver", Manufacturer 1="Texas Instruments", Vendor 1 Part Number=595-UCC27511AQDBVRQ1, CreatedBy="Judd Foster", HelpURL=https://www.ti.com/general/docs/suppproductinfo.tsp?distId=26&gotoUrl=https://www.ti.com/lit/gpn/ucc27511a-q1, Manufacturer 1 Part Number=UCC27511AQDBVRQ1, Part Name=UCC27511AQDBVRQ1, Vendor 1=Mouser

## Free pads (board coordinates)
  round 10 hole 4.2: ""(6,6) ""(6,71) ""(93,6) ""(93,71)

## Via types
v1: diameter 0.6, hole 0.3, L1 to L4, tented both sides, 327 vias

## Nets (pads, with @x,y where several pads share a name; then routed paths per layer and width w, separated by ;. In a path a pad name is that pad's centre, name@x,y a point inside that pad or via, vN(x,y) a via of type N, cw(c..) or ccw(c..) an arc to the next point about the centre after c; other vN are vias at no path point)
#CHG: R30.2 U1.11 | length 16.7
  L1 w0.2: R30.2 33.5,68 33,67.5 33,63.533 34.481,62.052 U1.11
#FLT: R31.2 U1.10 | length 13.5
  L1 w0.2: R31.2 33.792,66 33.5,65.708 33.5,63.74 34.688,62.552 U1.10
#FLTO: J2.8 U1.12 | length 44.6
  L1 w0.2: v1(42,60.2) 42,61.256 42.296,61.552 U1.12
  L1 w0.254: J2.8 v1(10.1,48)
  L4 w0.2: v1(10.1,48) 12.1,48 15.8,51.7 15.8,56.2 17.2,57.6 30,57.6 31.6,59.2 41,59.2 v1(42,60.2)
#MCLR: R3.2 U1.20 | length 12.1
  L1 w0.2: U1.20 48.437,61.167 v1(48.875,61.605)
  L4 w0.2: v1(48.875,61.605) 49.479,61 57.05,61 v1(58.45,62.4)
+5V0: C18.2 C22.2 C23.2 C24.2 C29.2 C30.2 C31.2 J1.2 L1.1 L2.2 Q3.4 Q3.5 R26.2 U1.7 U1.30 U3.5 U4.5 | length 9.1
  L1 w0.3: v1(37.35,65.35) Q3.4 Q3.5@37.995,66.05 ; v1(41.687,63.727) 42.187,63.727 42.512,64.052 U1.7 ; U1.30 52.863,64.052 53.188,63.727 v1(53.687,63.727)
  L1 w0.5: v1(28.575,66) 28.575,65.425 28.905,65.095 U4.5 ; v1(28.575,75) 28.575,74.425 28.905,74.095 U3.5
  other v1: 11.559,30.896 11.559,31.896 11.559,33.296 11.559,34.296 9.834,36.496 7.109,43.596
+5V0A: C13.2 C19.2 C20.2 C21.2 L1.2 U2.3
+15V: C34.2 C35.2 C36.2 U6.1
  other v1: 30.187,55.202 31.187,55.202 32.687,55.202 33.687,55.202 35.187,55.377
+24V: C1.1 C2.1 C3.1 C4.2 C26.2 C27.2 C28.2 J3.1 J3.2 J3.3 R4.1 R25.2 T1.1 T1.2 T1.3 T1.4 U5.3 | length 69.2
  L4 w0.2: v1(32.525,24) 32.525,31.475 31.8,32.2 23.2,32.2 21,34.4 21,44 23,46 42.4,46 44.4,48 44.4,56.6 44.8,57 48.94,57 v1(49.687,56.252)
  other v1: 6.859,30.796 6.859,31.796 6.859,33.296 6.859,34.296 7.009,35.596 7.034,36.796
COM: C1.2 C2.2 C3.2 C4.1 C6.1 C8.1 C10.1 C12.1 C13.1 C17.1 C18.1 C19.1 C20.1 C21.1 C22.1 C23.1 C24.1 C26.1 C27.1 C28.1 C29.1 C30.1 C31.1 C32.1 C34.1 C35.1 C36.1 J1.1 J1.3 J1.5 J1.7 J1.9 J1.10 J2.0 J2.2 J2.5 J3.4 J3.5 J3.6 J4.1 J4.4 M1.1 M1.2 pad.@6,6 pad.@6,71 pad.@93,71 R5.2 R7.2 R8.1 R16.1 R18.2 R19.1 R20.2 R22.1 R23.1 R24.1 R28.1 R29.1 R32.1 R33.1 T1.6 U1.6 U1.31 U2.2 U2.7 U3.8 U4.8 U5.1 U5.4 U6.4 U6.5 | length 104.1
  L1 w0.2: R16.1 34.94,32.94 35.75,33.75 39.75,33.75 47.9,25.6 65.807,25.6 76,35.793 76,50.95 R18.2 ; R19.1 59.94,32.94 60.75,33.75 68.186,33.75 72.5,38.064 72.5,50.95 R20.2
  L1 w0.3: v1(41.687,64.877) 42.187,64.877 42.512,64.552 U1.6 ; U1.31 52.863,64.552 53.188,64.877 v1(53.687,64.877)
  L1 w0.4: v1(70.675,56.675) U2.7 ; U2.2 77.176,56.675 77.426,56.425 v1(78,56.425)
  other v1: 31.5,3 32.5,3 33.5,3 34.5,3 35.5,3 36.5,3 37.5,3 38.5,3 39.5,3 31.5,4 32.5,4 33.5,4 34.5,4 35.5,4 36.5,4 37.5,4 38.5,4 39.5,4 31.5,5 32.5,5 33.5,5 34.5,5 35.5,5 36.5,5 37.5,5 38.5,5 39.5,5 71,24.2 72,24.2 74.5,24.2 75.5,24.2 78,24.2 79,24.2 81.5,24.2 82.5,24.2 33.6,27 34.6,27 35.6,27 36.6,27 37.6,27 38.6,27 39.6,27 55.28,27 56.28,27 57.28,27 58.28,27 59.28,27 60.28,27 61.28,27 33.6,28 34.6,28 35.6,28 36.6,28 37.6,28 38.6,28 39.6,28 55.28,28 56.28,28 57.28,28 58.28,28 59.28,28 60.28,28 61.28,28 33.6,29 34.6,29 35.6,29 36.6,29 37.6,29 38.6,29 39.6,29 55.28,29 56.28,29 57.28,29 58.28,29 59.28,29 60.28,29 61.28,29 33.6,30 34.6,30 35.6,30 36.6,30 37.6,30 38.6,30 39.6,30 55.28,30 56.28,30 57.28,30 58.28,30 59.28,30 60.28,30 61.28,30 4.059,30.796 8.759,30.896 33.6,31 34.6,31 35.6,31 36.6,31 37.6,31 38.6,31 39.6,31 55.28,31 56.28,31 57.28,31 58.28,31 59.28,31 60.28,31 61.28,31 4.059,31.796 8.759,31.896 33.6,32 34.6,32 35.6,32 36.6,32 37.6,32 38.6,32 39.6,32 55.28,32 56.28,32 57.28,32 58.28,32 59.28,32 60.28,32 61.28,32 25,33.05 26,33.05 27,33.05 28,33.05 29,33.05 30,33.05 4.059,33.296 8.759,33.296 25,34.05 26,34.05 27,34.05 28,34.05 29,34.05 30,34.05 4.059,34.296 8.759,34.296 25,35.05 26,35.05 27,35.05 28,35.05 29,35.05 30,35.05 25,36.05 26,36.05 27,36.05 28,36.05 29,36.05 8.684,36.496 5.884,36.796 5.459,38.456 7.259,38.456 4.559,38.646 3.5,39.746 7.134,42.396 1.7,45.65 2.7,45.65 79.5,50.1 80.5,50.1 82,50.1 83,50.1 84.5,50.1 85.5,50.1 30.187,52.402 31.187,52.402 32.687,52.402 33.687,52.402 7.25,54 8.25,54 35.187,54.227 93.5,56.05 45.187,56.252 48.187,56.252 51.187,56.252 68.45,56.5 91,56.5 68.45,58 7.25,60 8.25,60 36.687,60.102 37.637,60.102 25.095,64.2 1.7,64.35 2.7,64.35 27.425,66 25.095,73.2 27.425,75 39,75.55 51,75.55
CSN: C15.1 R18.1 R20.1 U2.8 | length 9.1
  L1 w0.2: U2.8 72.975,56.025 73.425,55.575 C15.1 73.425,52.975 v1(73,52.55)
  L4 w0.2: v1(73,52.55) 73.75,51.8 75.75,51.8 v1(76.5,52.55)
CSP: C15.2 R13.1 R15.1 U2.1 | length 9.1
  L1 w0.2: v1(75,52.55) 74.575,52.975 C15.2 74.575,55.575 75.025,56.025 U2.1
  L4 w0.2: v1(71.5,52.55) 72.25,53.3 74.25,53.3 v1(75,52.55)
D1_DE: U1.43 U3.3 | length 26.8
  L1 w0.2: v1(47,70.5) 47,70 47.437,69.563 U1.43
  L4 w0.2: v1(27.635,67.8) 27.635,69.435 28.8,70.6 39.551,70.6 42.351,73.4 45.449,73.4 47,71.849 v1(47,70.5)
D1_N: J2.3 R35.1 | length 24.2
  L1 w0.381: J2.3 8.433,57.318 10.5,57.318 11.5,58.317 11.5,61.398 14.5,64.398 14.5,68.763 16.554,70.818 20.767,70.818 R35.1
D1_P: J2.4 R34.1 | length 24.2
  L1 w0.381: J2.4 8.433,56.683 10.763,56.683 12.135,58.054 12.135,61.135 15.135,64.135 15.135,68.5 16.818,70.183 20.767,70.183 R34.1
D1_RE: U1.41 U3.2 | length 29.4
  L1 w0.2: v1(48,70.5) 48,70 48.437,69.563 U1.41
  L4 w0.2: v1(26.365,67.8) 26.365,69.365 28.2,71.2 39.303,71.2 42.103,74 45.697,74 48,71.697 v1(48,70.5)
D1_RX: U1.39 U3.1 | length 32.2
  L1 w0.2: v1(49,70.5) 49,70 49.437,69.563 U1.39
  L4 w0.2: v1(25.095,67.8) 25.095,69.495 27.4,71.8 39.054,71.8 41.854,74.6 45.946,74.6 49,71.546 v1(49,70.5)
D1_TX: U1.45 U3.4 | length 24.1
  L1 w0.2: v1(46,70.5) 46,70 46.437,69.563 U1.45
  L4 w0.2: v1(28.905,67.8) 28.905,69.305 29.6,70 39.8,70 42.6,72.8 45.2,72.8 46,72 v1(46,70.5)
D2_DE: U1.40 U4.3 | length 28.3
  L1 w0.2: v1(48.5,67) 48.937,67.437 U1.40
  L4 w0.2: v1(27.635,58.8) 27.635,60.435 28.8,61.6 45.497,61.6 48.5,64.603 v1(48.5,67)
D2_N: J2.6 R37.1 | length 21.6
  L1 w0.381: J2.6 8.433,51.318 11,51.318 14,54.318 14,59.398 16.419,61.818 20.767,61.818 R37.1
D2_P: J2.7 R36.1 | length 21.6
  L1 w0.381: J2.7 8.433,50.683 11.263,50.683 14.635,54.054 14.635,59.135 16.683,61.183 20.768,61.183 R36.1
D2_RE: U1.42 U4.2 | length 28.6
  L1 w0.2: v1(47.5,67) 47.937,67.437 U1.42
  L4 w0.2: v1(26.365,58.8) 26.365,60.365 28.2,62.2 45.249,62.2 47.5,64.451 v1(47.5,67)
D2_RX: U1.44 U4.1 | length 29.1
  L1 w0.2: v1(46.5,67) 46.937,67.437 U1.44
  L4 w0.2: v1(25.095,58.8) 25.095,60.495 27.4,62.8 45,62.8 46.5,64.3 v1(46.5,67)
D2_TX: U1.38 U4.4 | length 27.9
  L1 w0.2: v1(49.5,67) 49.937,67.437 U1.38
  L4 w0.2: v1(28.905,58.8) 28.905,60.305 29.6,61 45.746,61 49.5,64.754 v1(49.5,67)
DRAIN: Q1.2 Q2.2 R6.1 T1.9 T1.10 T1.11 T1.12 | length 46.6
  L4 w0.2: v1(46.687,56.252) 46.687,46.913 48.2,45.4 61.6,45.4 63.475,43.525 v1(63.475,24.5)
  other v1: 62.475,11.5 63.475,11.5 64.475,11.5 62.475,12.5 63.475,12.5 64.475,12.5 62.475,13.5 63.475,13.5 64.475,13.5 62.475,14.5 63.475,14.5 64.475,14.5 62.475,15.5 63.475,15.5 64.475,15.5 62.475,16.5 63.475,16.5 64.475,16.5 62.475,17.5 63.475,17.5 64.475,17.5 62.475,18.5 63.475,18.5 64.475,18.5 62.475,19.5 63.475,19.5 64.475,19.5 62.475,20.5 63.475,20.5 64.475,20.5 62.475,21.5 63.475,21.5 64.475,21.5 62.475,22.5 63.475,22.5 64.475,22.5 62.475,23.5 63.475,23.5 64.475,23.5 62.475,24.5 64.475,24.5
FB: C16.1 C17.2 R21.1 R22.2
GATE: R10.1 R12.1 R38.2 R39.2
  other v1: 23.56,51.5 24.56,51.5 48.56,51.5 49.56,51.5 36.687,52.302 37.687,52.302 39.187,52.302 40.187,52.302
GDRV: U1.22 U6.6 | length 22.4
  L1 w0.2: v1(35.737,60.102) 35.737,59.063 36,58.8 42.4,58.8 43,58.2 43,55.6 43.6,55 48.4,55 49,55.6 49,58.2 49.437,58.637 U1.22
GS0: R23.2 U1.25 U2.6 | length 25.9
  L1 w0.2: U1.25 54.448,61.552 55,61 55,57 56,56 65.975,56 67.3,57.325 69.277,57.325 69.55,57.052 ; v1(69.55,56.5) 69.55,57.052 ; U2.6 69.823,57.325 69.55,57.052
GS1: R24.2 U1.26 U2.5 | length 26.2
  L1 w0.2: U1.26 54.655,62.052 55.5,61.207 55.5,57.207 56.207,56.5 65.768,56.5 68.066,58.798 69.277,58.798 69.55,58.525 v1(69.55,58) 69.575,57.975 U2.5
HVOUT: C6.2 C7.2 C8.2 C10.2 C12.2 D2.1 J4.3 J4.6 R9.2 | length 21.3
  L1 w0.2: J4.3 95,19 ccw(c95,21) 97,21 97,26 ccw(c95,26) 95,28 94.313,28 cw(c94.313,30) 92.313,30 92.313,31.5
  other v1: 79.5,14.21 80.5,14.21 71,19.8 72,19.8 74.5,19.8 75.5,19.8 78,19.8 79,19.8 81.5,19.8 82.5,19.8
ISENSE: U1.24 U2.4 | length 30.7
  L1 w0.2: v1(50.025,61.605) 50.462,61.167 U1.24@50.462,60.102 ; v1(74.625,57.975) U2.4
  L4 w0.2: v1(50.025,61.605) 56.805,61.605 58.4,63.2 63,63.2 66.8,59.4 70,59.4 71.425,57.975 v1(74.625,57.975)
NetC7_1: C7.1 C9.2 R9.1 R11.2
NetC9_1: C9.1 C11.2 R11.1 R14.2
NetC11_1: C11.1 C14.2 R14.1 R17.2
NetC14_1: C14.1 C16.2 R17.1 R21.2
NetC25_1: C25.1 L2.1 U5.5 | length 6.1
  L1 w0.254: U5.5 7.109,41.171 C25.1 8.409,41.196 9.984,42.771 L2.1
NetC25_2: C25.2 U5.6 | length 1.5
  L1 w0.2: C25.2 6.609,40.571 U5.6
NetC32_2: C32.2 U5.7 | length 3.7
  L1 w0.2: C32.2@5.984,42.296 5.43,42.296 5.222,42.088 5.222,40.767 5.404,40.585 5.911,40.585 6.109,40.388 U5.7
NetC33_1: C33.1 R27.2 R29.2 U5.8 | length 3.7
  L1 w0.254: C33.1 3.384,41.146 R27.2 R29.2 5.104,39.746 5.294,39.936 U5.8
NetC33_2: C33.2 R26.1 R27.1 | length 3.7
  L1 w0.254: C33.2 3.384,42.246 R27.1 4.559,43.145 5.009,43.596 R26.1
NetD1_1: D1.1 D2.2
  other v1: 75.21,3.5 75.21,4.5 79.5,9.79 80.5,9.79
NetD1_2: D1.2 T1.7
  other v1: 70.79,3.5 62.975,4 63.975,4 70.79,4.5
NetD3_A: D3.A Q3.3 | length 4.6
  L1 w0.2: Q3.3 37.35,69.191 37.659,69.5 38.646,69.5 39,69.854 D3.A
NetD3_C: D3.C R32.2 | length 1.7
  L1 w0.2: D3.C R32.2
NetD4_A: D4.A Q3.6 | length 16.9
  L1 w0.2: Q3.6 39.545,66.045 40,66.5 40,70.656 40.594,71.25 D4.A
NetD4_C: D4.C R33.2 | length 1.7
  L1 w0.2: D4.C R33.2
NetJ1_4: J1.4 R1.1 | length 21.9
  L1 w0.2: R1.1 61,58 63.5,60.5 72.5,60.5 76.54,64.54 J1.4
NetJ1_6: J1.6 R2.1 | length 18.5
  L1 w0.2: R2.1 61.2,60.2 62.5,61.5 71,61.5 74,64.5 J1.6
NetJ1_8: J1.8 R3.1 | length 15
  L1 w0.2: R3.1 69.4,62.4 71.46,64.46 J1.8
NetQ1_1: Q1.1 R10.2 | length 6.5
  L1 w1: Q1.1 R10.2
NetQ2_1: Q2.1 R12.2 | length 6.5
  L1 w1: Q2.1 R12.2
NetQ3_1: Q3.1 R31.1 | length 4.6
  L1 w0.2: R31.1 36.335,66 36.532,66.197 36.532,66.545 36.704,66.717 38.279,66.717 38.65,67.088 Q3.1
NetQ3_2: Q3.2 R30.1 | length 3.9
  L1 w0.2: R30.1 35.55,67.356 35.757,67.148 37.79,67.148 38,67.358 Q3.2
NetR25_1: R25.1 R28.2 U5.2 | length 7.5
  L1 w0.254: R28.2 3.5,37.828 3.719,37.609 4.305,37.609 4.559,37.355 ; R25.1 4.771,35.596 4.559,35.807 4.559,37.355 ; U5.2 6.109,37.787 5.931,37.609 4.813,37.609 4.559,37.355
NetR34_2: R34.2 U3.6 | length 7.8
  L1 w0.254: R34.2 26,69.5 27.635,71.135 U3.6
NetR35_2: R35.2 U3.7 | length 5.2
  L1 w0.254: R35.2 25.845,71.5 26.365,72.02 U3.7
NetR36_2: R36.2 U4.6 | length 7.8
  L1 w0.254: R36.2 26,60.5 27.635,62.135 U4.6
NetR37_2: R37.2 U4.7 | length 5.2
  L1 w0.254: R37.2 25.845,62.5 26.365,63.02 U4.7
NetR38_1: R38.1 U6.2
  other v1: 36.687,55.302 37.687,55.302
NetR39_1: R39.1 U6.3
  other v1: 39.187,55.302 40.187,55.302
PGC: R1.2 U1.18 | length 17.1
  L1 w0.2: U1.18 47.437,61.167 v1(47.875,61.605)
  L4 w0.2: v1(47.875,61.605) 47.875,60.475 46.8,59.4 46.8,58.4 47.2,58 v1(58.45,58)
PGD: R2.2 U1.19 | length 13.3
  L1 w0.2: v1(47.5,58.6) 47.937,59.037 U1.19
  L4 w0.2: v1(47.5,58.6) 56.85,58.6 v1(58.45,60.2)
PSYNC: J2.1 U1.37 | length 55.5
  L1 w0.2: v1(50,70.5) 50,70 50.437,69.563 U1.37
  L1 w0.254: J2.1 v1(10.1,62)
  L4 w0.2: v1(10.1,62) 11,62 13.6,64.6 13.6,70 16,72.4 38.806,72.4 41.606,75.2 46.194,75.2 50,71.394 v1(50,70.5)
RVDRAIN: R6.2 R7.1 R8.2 U1.21 | length 6.1
  L1 w0.2: R8.2 R6.2 R7.1 48.187,58.287 48.937,59.037 U1.21
RVIN: R4.2 R5.1 U1.23 | length 4.5
  L1 w0.2: R4.2@49.687,57.327 50.304,57.327 50.5,57.523 ; U1.23 49.937,59.037 50.5,58.475 50.5,57.523 ; R5.1@51.187,57.327 50.696,57.327 50.5,57.523
SH1_P: Q1.3 R13.2 R16.2 | length 70.9
  L1 w0.2: R16.2 34.94,35.06 35.75,34.25 39.957,34.25 48.107,26.1 65.6,26.1 75.5,36 75.5,50.95 R13.2
  L1 w2: R16.2 Q1.3
SH2_P: Q2.3 R15.2 R19.2 | length 34.3
  L1 w0.2: R19.2 59.94,35.06 60.75,34.25 67.979,34.25 72,38.271 72,50.95 R15.2
  L1 w2: R19.2 Q2.3
pads on no net: J3. J4. J4.2 J4.5 T1.5 T1.8 U1.1 U1.2 U1.3 U1.4 U1.5 U1.8 U1.9 U1.13 U1.14 U1.15 U1.16 U1.17 U1.27 U1.28 U1.29 U1.32 U1.33 U1.34 U1.35 U1.36 U1.46 U1.47 U1.48

## Polygon pours and split planes (outlines as drawn)
+5V0 on L3 "NONET_L-01_P-001" (solid, remove dead copper, pour order 2): 0,30.496 0,77 86.05,77 86.05,59.4 20,59.4 13.909,53.309 13.909,30.496
COM on L3 "NONET_L-01_P-001" (solid, remove dead copper, pour order 9): 0,0 39.8,0 39.8,25.2 65.05,25.2 65.05,23.425 85.284,23.425 ccw(c85.284,25.425) 86.317,23.713 cw(c87.35,22) 87.35,24 90.35,24 ccw(c90.35,25) 90.35,26 86.35,26 86.35,49.45 86.625,49.45 ccw(c86.625,51.95) 89.125,51.95 89.125,54.35 cw(c90.425,54.35) 90.425,55.65 99,55.65 99,77 86.25,77 86.25,59.2 20.083,59.2 14.109,53.226 14.109,30.296 0,30.296
COM on L2 "NONET_L-01_P-001" (solid, remove dead copper, pour order 8): 0,0 39.8,0 39.8,25.2 65.05,25.2 65.05,23.425 85.284,23.425 ccw(c85.284,25.425) 86.317,23.713 cw(c87.35,22) 87.35,24 90.35,24 ccw(c90.35,25) 90.35,26 86.35,26 86.35,49.45 86.625,49.45 ccw(c86.625,51.95) 89.125,51.95 89.125,54.35 cw(c90.425,54.35) 90.425,55.65 99,55.65 99,77 0,77
+24V on L1 "NONET_L-01_P-001" (solid, remove dead copper, pour order 10): 0,0 0,30.296 4.909,30.296 4.909,35.071 6.609,35.071 6.609,37.35 6.459,37.5 6.459,38.791 6.759,38.791 6.759,37.915 7.909,37.915 7.909,30.296 14.109,30.296 14.109,36.4 24.4,36.4 24.4,32.55 32.955,32.55 32.955,26.355 33.9,26.355 33.9,11 30.95,11 30.95,0

## Other copper
L1:
  rectangle net COM: 0.5,62 3.9,65.6
  rectangle net COM: 0.5,44.4 3.9,48
  region net COM: 89.425,56.65 ccw(c90.425,56.65) 90.425,55.65 94.2,55.65 ccw(c94.2,56.65) 95.2,56.65 ccw(c94.2,56.65) 94.2,57.65 90.425,57.65 ccw(c90.425,56.65)
  region net +5V0: 78.08,59.4 86.05,59.4 86.05,67.73 79.08,67.73 ccw(c79.08,66.73) 78.08,66.73
  region net COM: 69.625,24.2 69.625,25.225 cw(c70.4,25.225) 70.4,26 90.35,26 cw(c90.35,25) 90.35,24 87.35,24 ccw(c87.35,22) 86.317,23.713 cw(c85.284,25.425) 85.284,23.425 70.4,23.425 cw(c70.4,24.2)
  region net HVOUT: 77.628,14.13 77.628,18.025 ccw(c76.628,18.025) 76.628,19.025 70.4,19.025 cw(c70.4,19.8) 70.4,20.575 85.284,20.575 cw(c85.284,18.575) 86.317,20.287 ccw(c87.35,22) 87.35,20 90.35,20 cw(c90.35,19) 90.35,18 83.372,18 ccw(c83.372,17) 82.372,17 82.372,14.13 cw(c81.372,14.13) 81.372,13.13 78.628,13.13 cw(c78.628,14.13)
  region net FB: 89.425,52.5 ccw(c90.425,52.5) 90.425,51.5 94.2,51.5 ccw(c94.2,52.5) 95.2,52.5 95.2,54.35 ccw(c94.2,54.35) 94.2,55.35 90.425,55.35 ccw(c90.425,54.35) 89.425,54.35
  region net NetC14_1: 89.425,48 ccw(c90.425,48) 90.425,47 94.2,47 ccw(c94.2,48) 95.2,48 95.2,49.5 ccw(c94.2,49.5) 94.2,50.5 90.425,50.5 ccw(c90.425,49.5) 89.425,49.5
  region net NetC11_1: 89.425,43.5 ccw(c90.425,43.5) 90.425,42.5 94.2,42.5 ccw(c94.2,43.5) 95.2,43.5 95.2,45 ccw(c94.2,45) 94.2,46 90.425,46 ccw(c90.425,45) 89.425,45
  region net NetC9_1: 89.425,39 89.425,40.5 cw(c90.425,40.5) 90.425,41.5 94.2,41.5 cw(c94.2,40.5) 95.2,40.5 95.2,39 cw(c94.2,39) 94.2,38 90.425,38 cw(c90.425,39)
  region net NetC7_1: 89.425,34.5 89.425,36 cw(c90.425,36) 90.425,37 94.2,37 cw(c94.2,36) 95.2,36 95.2,34.5 cw(c94.2,34.5) 94.2,33.5 90.425,33.5 cw(c90.425,34.5)
  region net HVOUT: 90.425,30.5 94.2,30.5 ccw(c94.2,31.5) 94.2,32.5 90.425,32.5 ccw(c90.425,31.5)
  region net NetD1_1: 74.13,2.628 ccw(c75.13,2.628) 75.13,1.628 76.628,1.628 ccw(c76.628,7.372) 82.372,7.372 82.372,9.869 ccw(c81.372,9.869) 81.372,10.869 78.628,10.869 ccw(c78.628,9.869) 77.628,9.869 77.628,7.372 cw(c76.628,7.372) 76.628,6.372 75.13,6.372 ccw(c75.13,5.372) 74.13,5.372
  region net NetD1_2: 62.1,3 cw(c62.1,4) 62.1,5 64.85,5 ccw(c64.85,7) 66.358,5.686 cw(c67.865,4.371) 67.865,6.372 70.87,6.372 cw(c70.87,5.372) 71.87,5.372 71.87,2.628 cw(c70.869,2.628) 70.869,1.628 67.865,1.628 cw(c67.865,3.628) 66.358,2.314 ccw(c64.85,1) 64.85,3
  region net COM: 24.6,32.75 30.4,32.75 30.4,35.2 29.2,36.4 24.6,36.4
  region net GATE: 23.16,50.85 23.16,52.952 29.587,52.952 29.587,51.552 34.287,51.552 34.287,52.952 49.935,52.952 49.935,50.85
  region net +5V0: 8.809,36.996 8.809,39.796 13.909,39.796 13.909,30.496 9.609,30.496 9.609,34.896 9.309,34.896 9.309,36.996
  region net COM: 31.15,2.6 39.8,2.6 39.8,5.4 31.15,5.4
  region net COM: 61.725,26.555 54.835,26.555 54.835,32.445 61.725,32.445
  region net COM: 33.155,26.555 40.045,26.555 40.045,32.445 33.155,32.445
  region net +15V: 29.787,54.552 34.687,54.552 34.687,54.952 36.037,54.952 36.037,58.052 29.787,58.052
  region net NetR39_1: 37.337,56.302 37.337,58.052 40.587,58.052 40.587,54.652 38.787,54.652 38.787,56.302
  region net NetR38_1: 36.287,54.652 38.087,54.652 38.087,55.952 36.987,55.952 36.987,58.052 36.287,58.052
  region net +5V0A: 75.475,57.1 75.475,57.55 77.25,57.55 77.7,58 79.55,58 79.95,57.6 86.05,57.6 86.05,52.25 78.95,52.25 78.95,56.6 78.45,57.1
  region net DRAIN: 62.1,11 62.1,25 64.85,25 64.85,11
L2:
  region net NetD1_2: 62.1,3 cw(c62.1,4) 62.1,5 64.85,5 ccw(c64.85,7) 66.358,5.686 cw(c67.865,4.371) 67.865,6.372 70.87,6.372 cw(c70.87,5.372) 71.87,5.372 71.87,2.628 cw(c70.869,2.628) 70.869,1.628 67.865,1.628 cw(c67.865,3.628) 66.358,2.314 ccw(c64.85,1) 64.85,3
  region net NetD1_1: 74.13,2.628 ccw(c75.13,2.628) 75.13,1.628 76.628,1.628 ccw(c76.628,7.372) 82.372,7.372 82.372,9.869 ccw(c81.372,9.869) 81.372,10.869 78.628,10.869 ccw(c78.628,9.869) 77.628,9.869 77.628,7.372 cw(c76.628,7.372) 76.628,6.372 75.13,6.372 ccw(c75.13,5.372) 74.13,5.372
  region net HVOUT: 77.628,14.13 77.628,18.025 ccw(c76.628,18.025) 76.628,19.025 70.4,19.025 cw(c70.4,19.8) 70.4,20.575 85.284,20.575 cw(c85.284,18.575) 86.317,20.287 ccw(c87.35,22) 87.35,20 90.35,20 cw(c90.35,19) 90.35,18 83.372,18 ccw(c83.372,17) 82.372,17 82.372,14.13 cw(c81.372,14.13) 81.372,13.13 78.628,13.13 cw(c78.628,14.13)
  region net DRAIN: 62.1,11 62.1,25 64.85,25 64.85,11
L3:
  region net NetD1_2: 62.1,3 cw(c62.1,4) 62.1,5 64.85,5 ccw(c64.85,7) 66.358,5.686 cw(c67.865,4.371) 67.865,6.372 70.87,6.372 cw(c70.87,5.372) 71.87,5.372 71.87,2.628 cw(c70.869,2.628) 70.869,1.628 67.865,1.628 cw(c67.865,3.628) 66.358,2.314 ccw(c64.85,1) 64.85,3
  region net NetD1_1: 74.13,2.628 ccw(c75.13,2.628) 75.13,1.628 76.628,1.628 ccw(c76.628,7.372) 82.372,7.372 82.372,9.869 ccw(c81.372,9.869) 81.372,10.869 78.628,10.869 ccw(c78.628,9.869) 77.628,9.869 77.628,7.372 cw(c76.628,7.372) 76.628,6.372 75.13,6.372 ccw(c75.13,5.372) 74.13,5.372